# EAGLE board CryptoShield_Panel_v10 (EAGLE 6.6.0), part 1 of 3
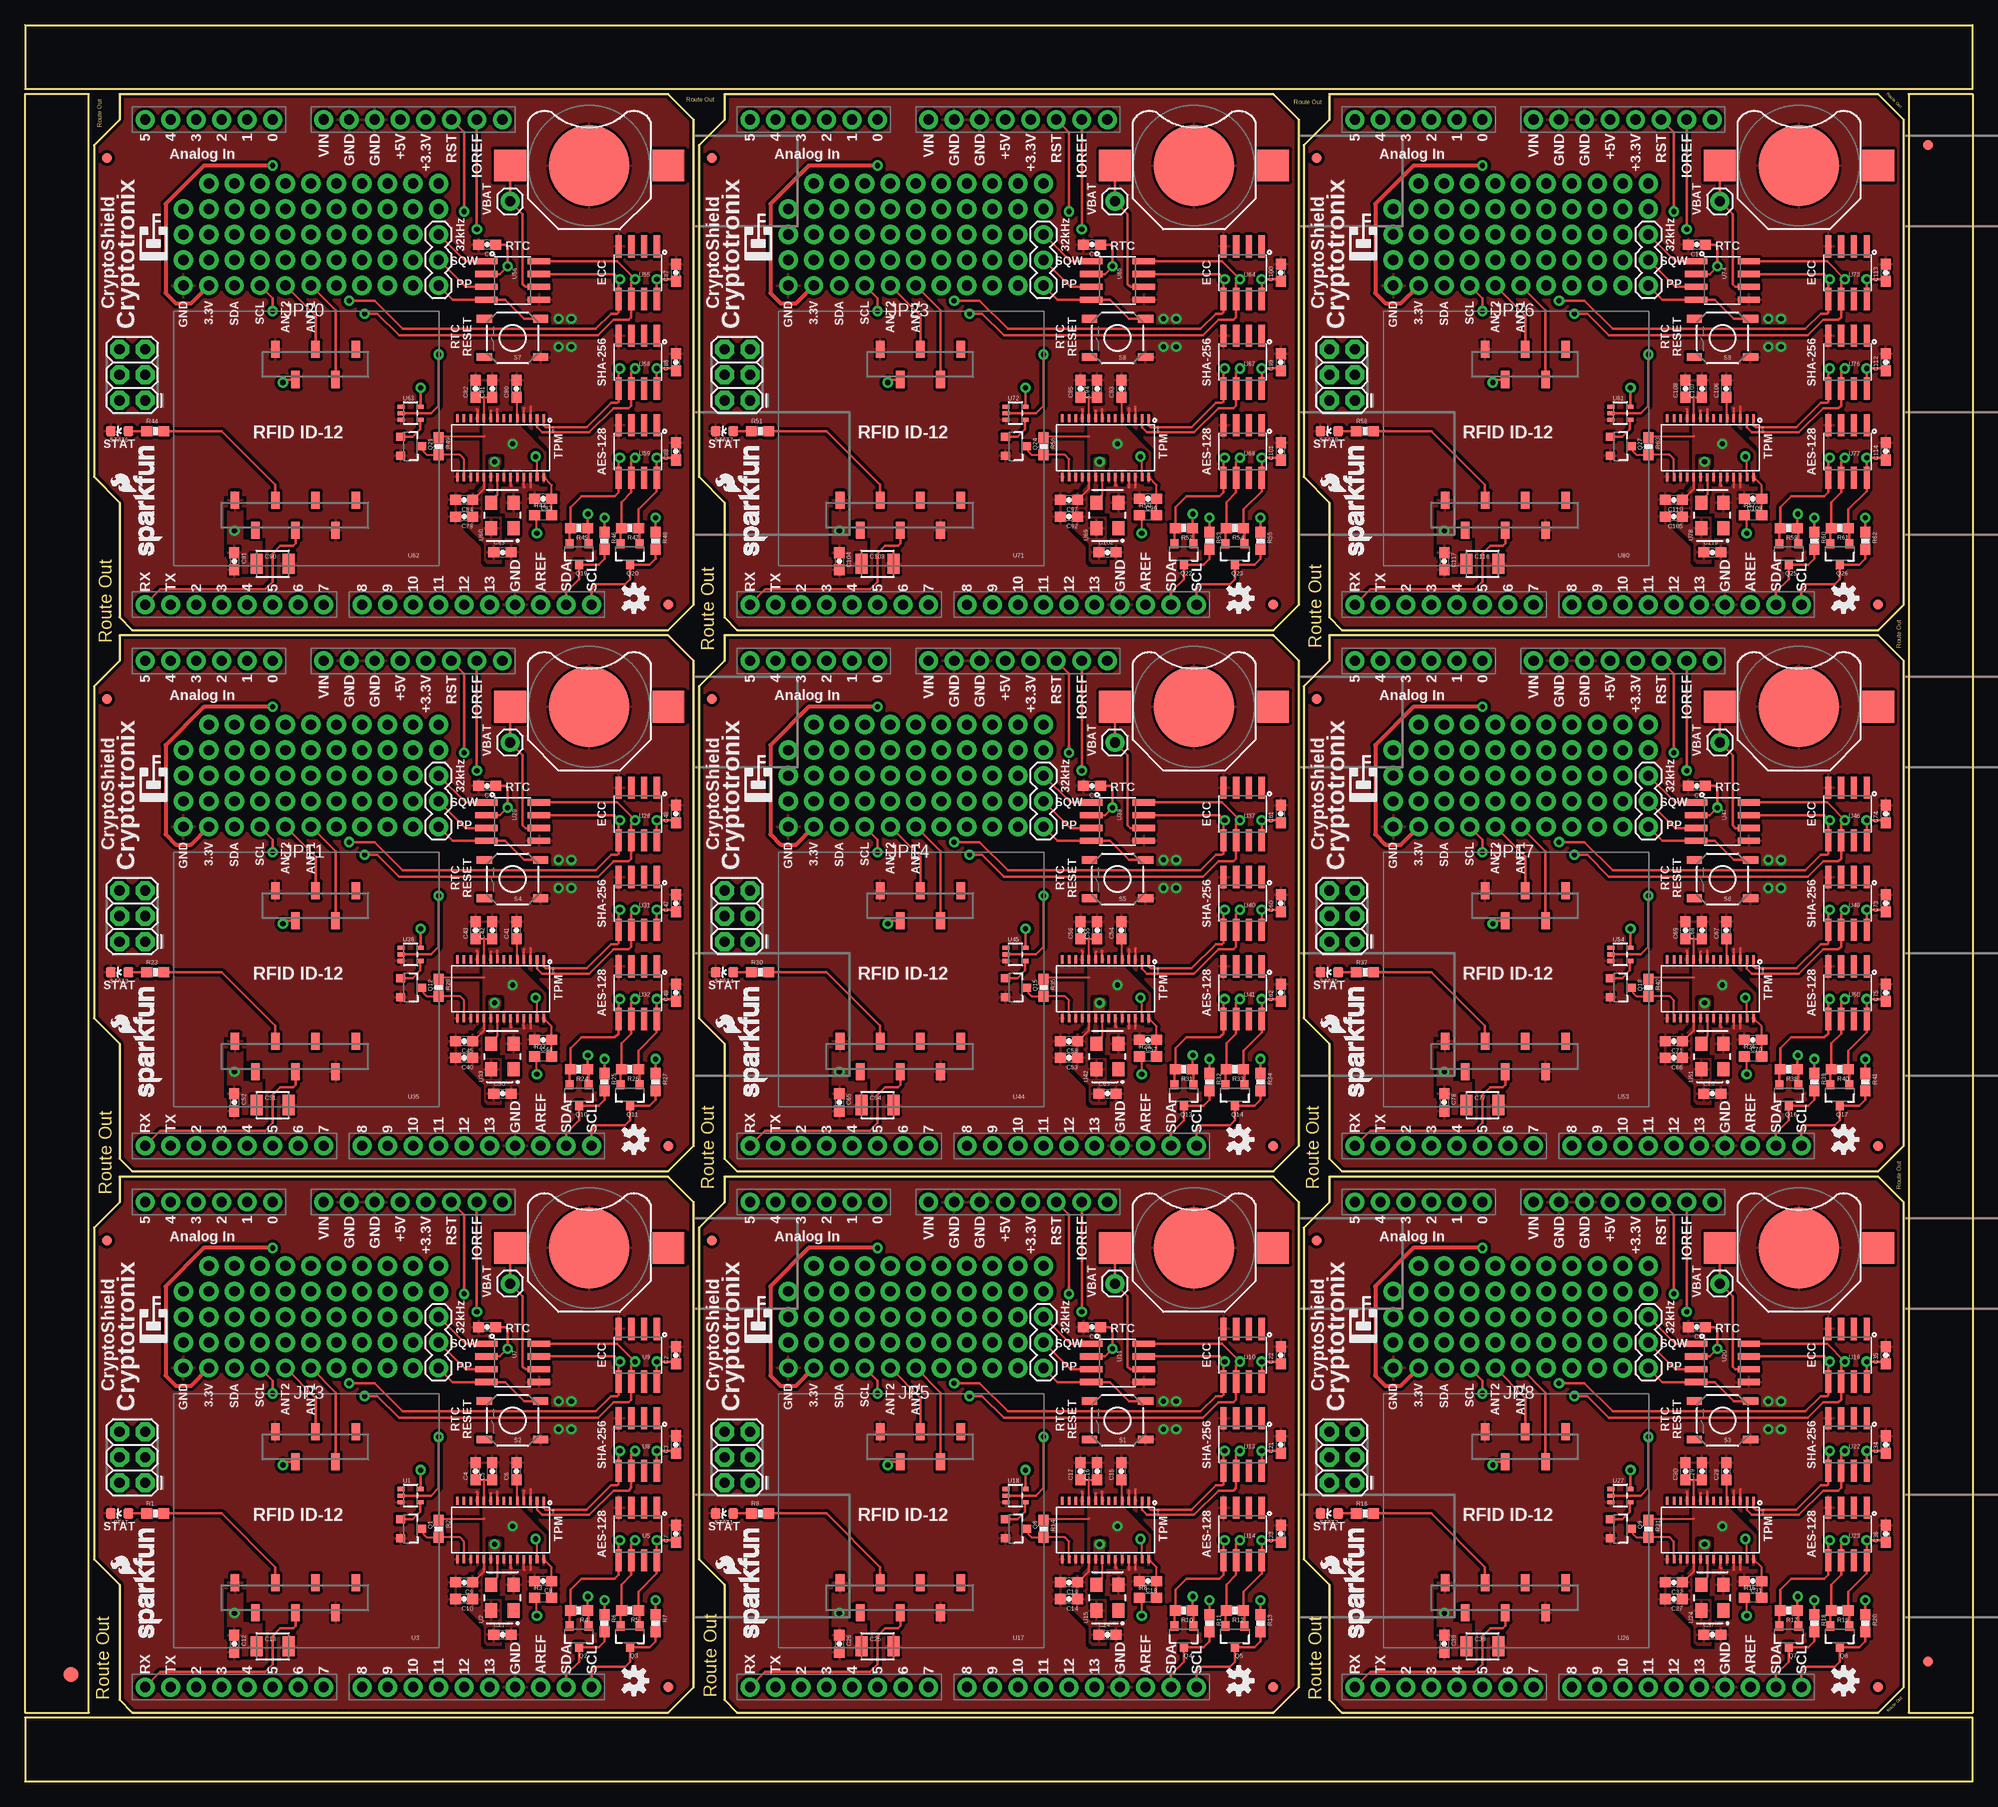
[diagram p0: board, top side]
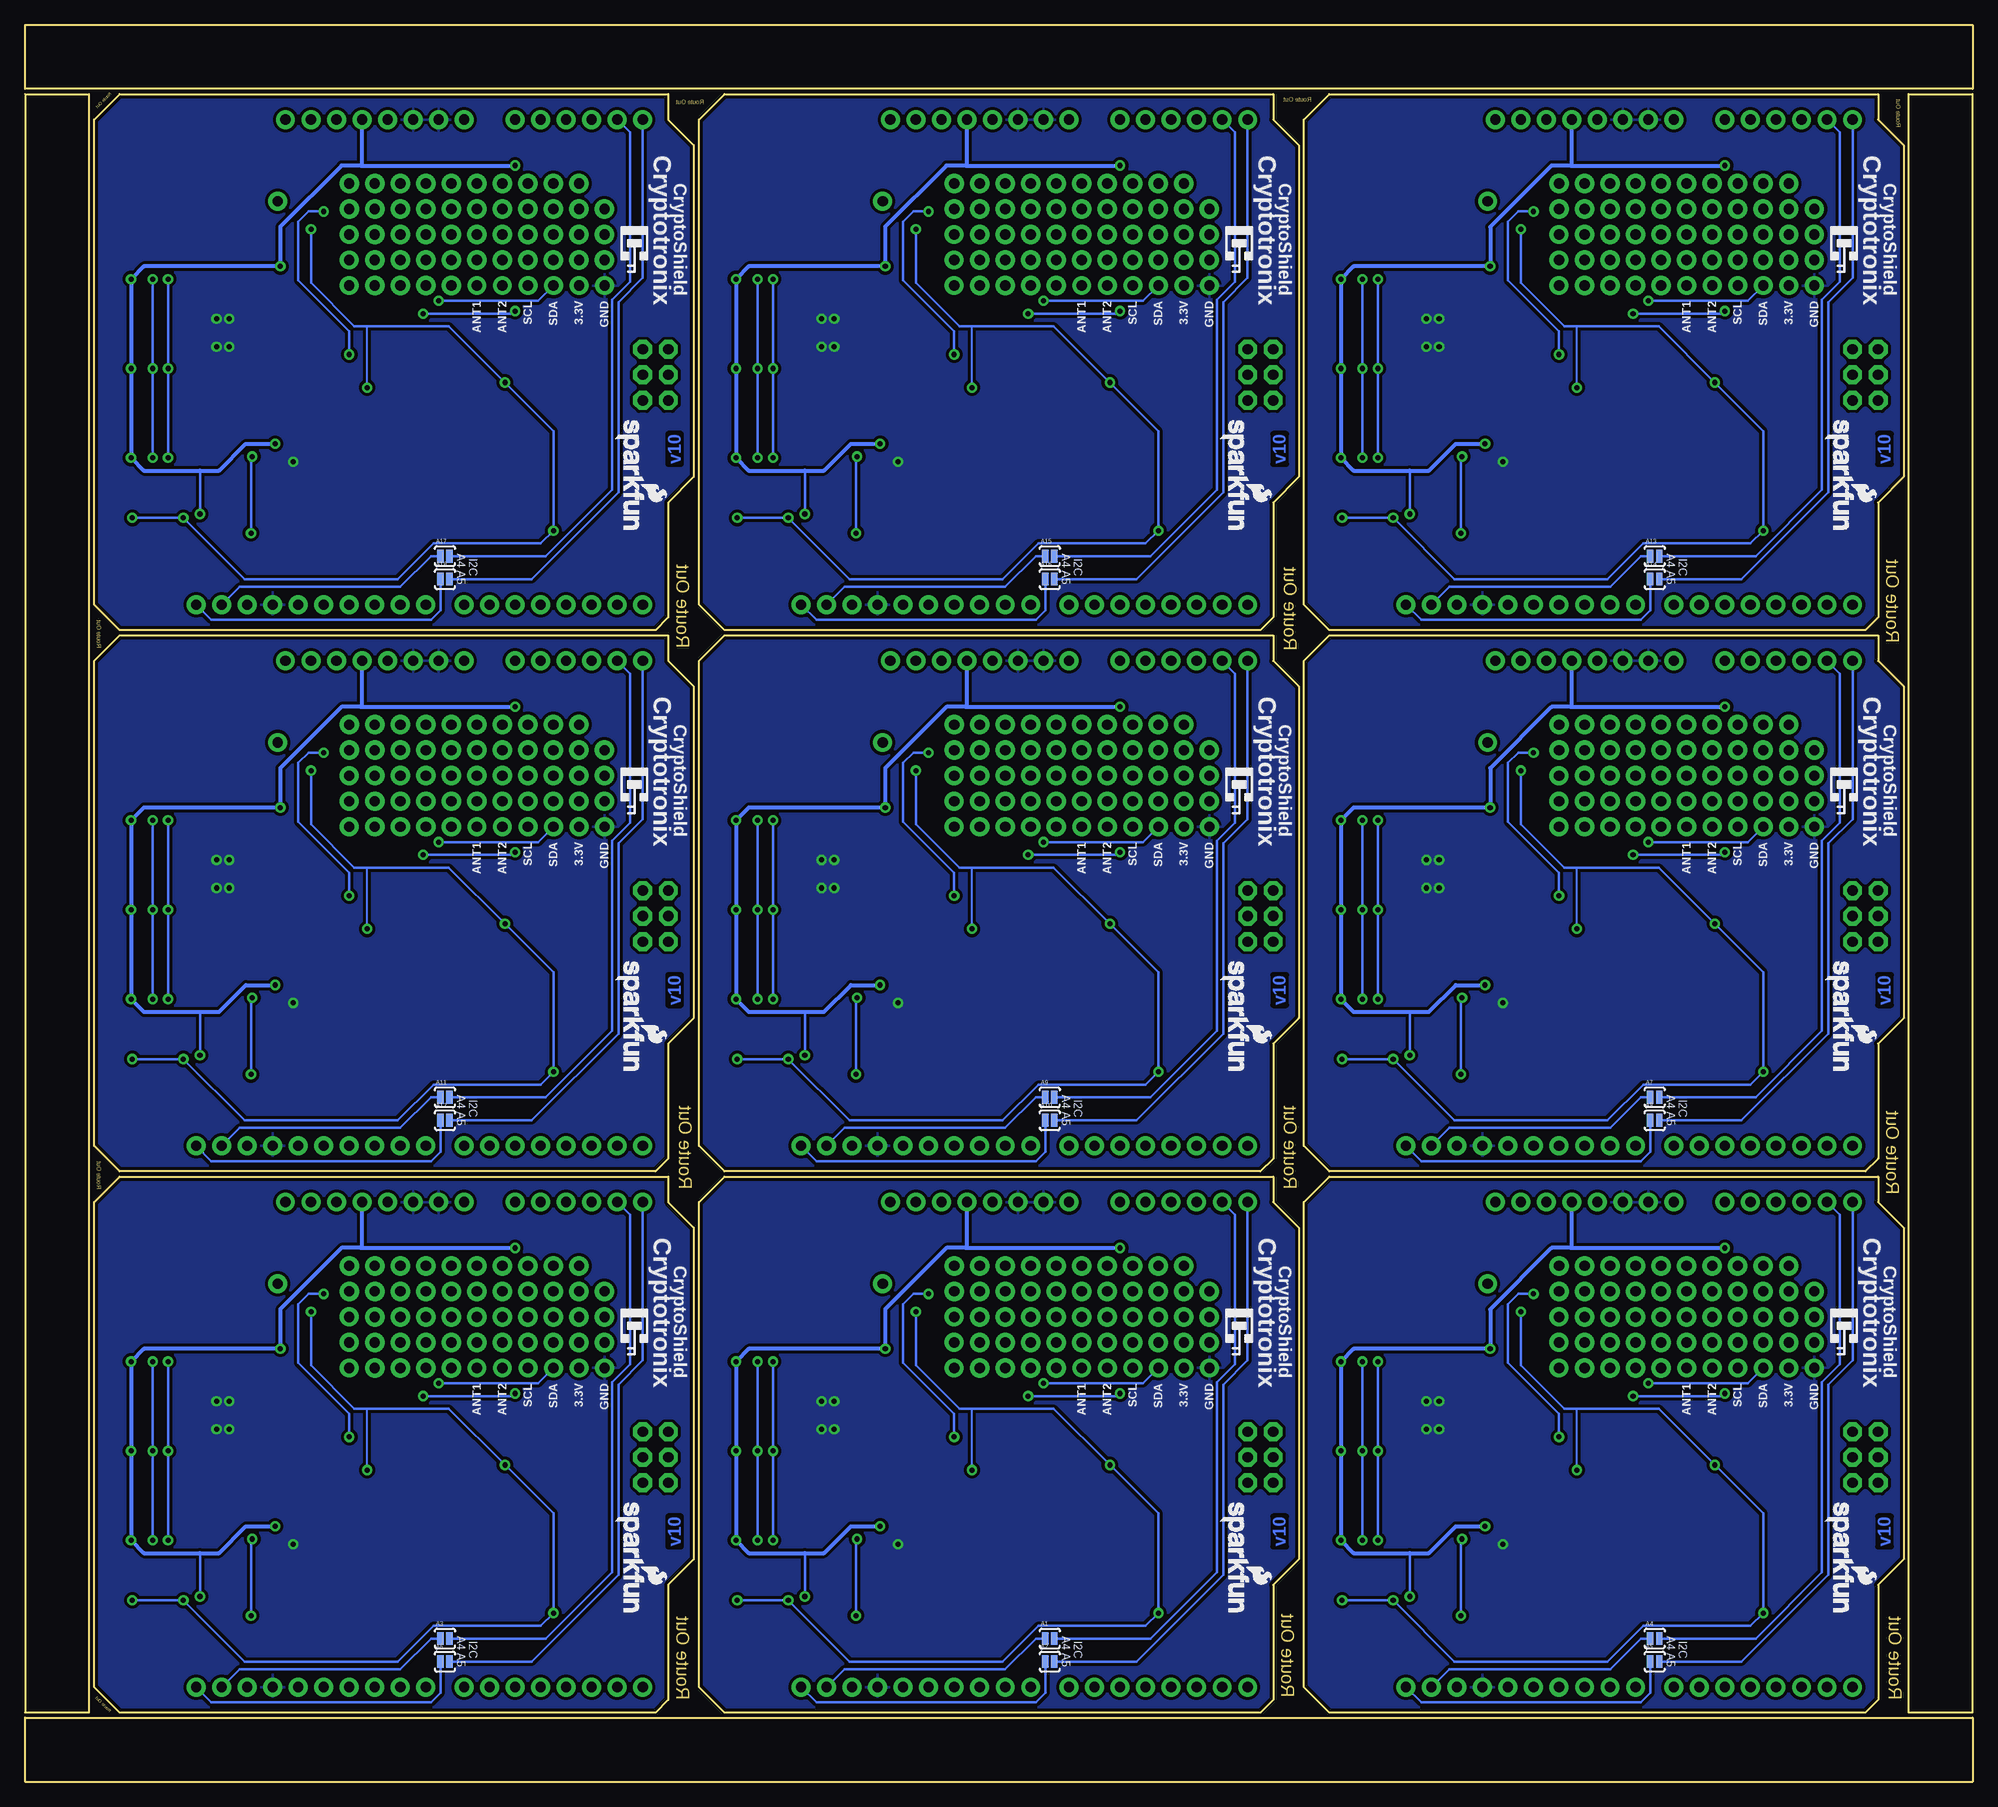
[diagram p1: board, bottom side, seen from below]

Size 193.8 x 174.75 mm. Coordinates in mm from the lower left corner, seen from the top.
Outline: 10.67,6.86 64.01,6.86 66.55,9.4 66.55,57.66 64.01,60.2 9.4,60.2 9.4,57.66 6.86,55.12 6.86,22.1 9.4,19.56 9.4,8.13 10.67,6.86
Outline: 70.87,6.86 124.21,6.86 126.75,9.4 126.75,57.66 124.21,60.2 69.6,60.2 69.6,57.66 67.06,55.12 67.06,22.1 69.6,19.56 69.6,8.13 70.87,6.86
Outline: 131.06,6.86 184.4,6.86 186.94,9.4 186.94,57.66 184.4,60.2 129.79,60.2 129.79,57.66 127.25,55.12 127.25,22.1 129.79,19.56 129.79,8.13 131.06,6.86
Outline: 10.67,60.71 64.01,60.71 66.55,63.25 66.55,111.51 64.01,114.05 9.4,114.05 9.4,111.51 6.86,108.97 6.86,75.95 9.4,73.41 9.4,61.98 10.67,60.71
Outline: 70.87,60.71 124.21,60.71 126.75,63.25 126.75,111.51 124.21,114.05 69.6,114.05 69.6,111.51 67.06,108.97 67.06,75.95 69.6,73.41 69.6,61.98 70.87,60.71
Outline: 131.06,60.71 184.4,60.71 186.94,63.25 186.94,111.51 184.4,114.05 129.79,114.05 129.79,111.51 127.25,108.97 127.25,75.95 129.79,73.41 129.79,61.98 131.06,60.71
Outline: 10.67,114.55 64.01,114.55 66.55,117.09 66.55,165.35 64.01,167.89 9.4,167.89 9.4,165.35 6.86,162.81 6.86,129.79 9.4,127.25 9.4,115.82 10.67,114.55
Outline: 70.87,114.55 124.21,114.55 126.75,117.09 126.75,165.35 124.21,167.89 69.6,167.89 69.6,165.35 67.06,162.81 67.06,129.79 69.6,127.25 69.6,115.82 70.87,114.55
Outline: 131.06,114.55 184.4,114.55 186.94,117.09 186.94,165.35 184.4,167.89 129.79,167.89 129.79,165.35 127.25,162.81 127.25,129.79 129.79,127.25 129.79,115.82 131.06,114.55
Outline: 6.35,6.86 6.35,167.89 0,167.89 0,6.86 6.35,6.86
Outline: 0,6.35 0,0 193.8,0 193.8,6.35 0,6.35
Outline: 0,168.4 193.8,168.4 193.8,174.75 0,174.75 0,168.4
Outline: 187.45,167.89 187.45,6.86 193.8,6.86 193.8,167.89 187.45,167.89
Copper layers (1*16): Top 0.035mm / dielectric 1.5mm / Bottom 0.035mm
Design rules "SparkFun-2-layer": minimum track width 7mil, minimum drill 15mil, track to track 8mil, track to pad 8mil, pad to pad 8mil, via to via 8mil, smd to smd 8mil, copper to edge 8mil, drill to drill 8mil, minimum pad ring 12mil, minimum via ring 10mil, stop-mask expansion 4mil, vias tented up to drill 20mil, thermal gap 10mil
tRestrict: 36 lines

## Footprints (pad centres in the part's own frame; a part is rotated, then mirrored left to right if it is on the bottom)
PAD-JUMPER-2-NO_YES_SILK = smd 0.635 x 1.27: 1 -0.45,0; 2 0.45,0
BATTCON_12MM = smd 8 x 8: GND 0,0 | smd 3.175 x 3.175: PWR@1 -7.874,0; PWR@2 7.874,0
0603-CAP = smd 1.1 x 1: 1 -0.85,0; 2 0.85,0
1210 = smd 1.2 x 2: 1 -1.6,0; 2 1.6,0
FIDUCIAL-1.5X3 = smd 1.5 x 1.5: 1 0,0
FIDUCIAL-1X2 = smd 1 x 1: 1 0,0
2X3 = drill 1.016 pad 1.88 octagon: 1 0,0; 2 0,2.54; 3 2.54,0; 4 2.54,2.54; 5 5.08,0; 6 5.08,2.54
1X01 = drill 1.016 pad 1.88: 1 0,0
1X03 = drill 1.016 pad 1.88: 1 0,0; 2 2.54,0; 3 5.08,0
1X06_NO_SILK = drill 1.016 pad 1.88: 1 0,0; 2 2.54,0; 3 5.08,0; 4 7.62,0; 5 10.16,0; 6 12.7,0
SOT23-3 = smd 0.8 x 0.9: 1 -0.95,-1; 2 0.95,-1; 3 0,1.1
0603-RES = smd 1.1 x 1: 1 -0.85,0; 2 0.85,0
0603 = smd 1.1 x 1: 1 -0.85,0; 2 0.85,0
TACTILE-SWITCH-SMD = smd 1.524 x 0.762: 1 -2.794,1.905; 2 2.794,1.905; 3 -2.794,-1.905; 4 2.794,-1.905
LED-0603 = smd 1 x 1: A 0,-0.877; C 0,0.877
SOT353 = smd 0.42 x 0.7: 1 -0.65,-0.95; 2 0,-0.95; 3 0.65,-0.95; 4 0.65,0.95; 5 -0.65,0.95
CRYSTAL-OSC-SMD-5X3.2 = smd 1.397 x 1.194: 1 -1.27,-1.1; 2 1.27,-1.1; 3 1.27,1.1; 4 -1.27,1.1
ID-12_SMD = smd 0.85 x 1.7: 1 16.248,3.81; 2 14.248,6.81; 3 12.248,3.81; 4 10.248,6.81; 5 8.248,3.81; 6 8.248,18.822; 7 10.248,21.822; 8 12.248,18.822; 9 14.248,21.822; 10 16.248,18.822; 11 20.248,18.822; NC 18.248,21.822
UNO_R3_SHIELD = drill 1.016 pad 1.88: 3.3V 50.8,26.67; 5V 50.8,29.21; A0 50.8,41.91; A1 50.8,44.45; A2 50.8,46.99; A3 50.8,49.53; A4 50.8,52.07; A5 50.8,54.61; AREF 2.54,15.24; D2 2.54,49.53; D3 2.54,46.99; D4 2.54,44.45; D5 2.54,41.91; D6 2.54,39.37; D7 2.54,36.83; D8 2.54,33.02; D9 2.54,30.48; D10 2.54,27.94; D11 2.54,25.4; D12 2.54,22.86; D13 2.54,20.32; GND@0 50.8,31.75; GND@1 50.8,34.29; GND@2 2.54,17.78; IOREF 50.8,21.59; NC 50.8,19.05; RES 50.8,24.13; RX 2.54,54.61; SCL 2.54,10.16; SDA 2.54,12.7; TX 2.54,52.07; VIN 50.8,36.83
SOIC8 = smd 0.61 x 2.21: 1 -1.905,-2.616; 2 -0.635,-2.616; 3 0.635,-2.616; 4 1.905,-2.616; 5 1.905,2.616; 6 0.635,2.616; 7 -0.635,2.616; 8 -1.905,2.616
TSSOP28 = smd 0.8 x 0.25: 1 -2.921,4.623; 2 -2.921,3.962; 3 -2.921,3.302; 4 -2.921,2.642; 5 -2.921,1.981; 6 -2.921,1.321; 7 -2.921,0.66; 8 -2.927,0; 9 -2.921,-0.66; 10 -2.921,-1.321; 11 -2.921,-1.981; 12 -2.921,-2.642; 13 -2.921,-3.302; 14 -2.921,-3.962; 15 2.921,-3.962; 16 2.921,-3.302; 17 2.921,-2.642; 18 2.921,-1.981; 19 2.921,-1.321; 20 2.921,-0.66; 21 2.927,0; 22 2.921,0.66; 23 2.921,1.321; 24 2.921,1.981; 25 2.921,2.642; 26 2.921,3.302; 27 2.921,3.962; 28 2.921,4.623

## Placement (x,y rotation side)
A1  [PAD-JUMPER-2-NO_YES_SILK]  91.82,14.22 0 bottom
A2  [PAD-JUMPER-2-NO_YES_SILK]  91.82,11.94 0 bottom
A3  [PAD-JUMPER-2-NO_YES_SILK]  152.02,14.22 0 bottom
A4  [PAD-JUMPER-2-NO_YES_SILK]  31.62,14.22 0 bottom
A5  [PAD-JUMPER-2-NO_YES_SILK]  31.62,11.94 0 bottom
A6  [PAD-JUMPER-2-NO_YES_SILK]  152.02,11.94 0 bottom
A7  [PAD-JUMPER-2-NO_YES_SILK]  31.62,68.07 0 bottom
A8  [PAD-JUMPER-2-NO_YES_SILK]  31.62,65.79 0 bottom
A9  [PAD-JUMPER-2-NO_YES_SILK]  91.82,68.07 0 bottom
A10  [PAD-JUMPER-2-NO_YES_SILK]  91.82,65.79 0 bottom
A11  [PAD-JUMPER-2-NO_YES_SILK]  152.02,68.07 0 bottom
A12  [PAD-JUMPER-2-NO_YES_SILK]  152.02,65.79 0 bottom
A13  [PAD-JUMPER-2-NO_YES_SILK]  31.62,121.92 0 bottom
A14  [PAD-JUMPER-2-NO_YES_SILK]  31.62,119.63 0 bottom
A15  [PAD-JUMPER-2-NO_YES_SILK]  91.82,121.92 0 bottom
A16  [PAD-JUMPER-2-NO_YES_SILK]  91.82,119.63 0 bottom
A17  [PAD-JUMPER-2-NO_YES_SILK]  152.02,121.92 0 bottom
A18  [PAD-JUMPER-2-NO_YES_SILK]  152.02,119.63 0 bottom
BAT1  3V  [BATTCON_12MM]  56.13,53.09 0 top
BAT2  3V  [BATTCON_12MM]  116.33,53.09 0 top
BAT3  3V  [BATTCON_12MM]  176.53,53.09 0 top
BAT4  3V  [BATTCON_12MM]  56.13,106.93 0 top
BAT5  3V  [BATTCON_12MM]  116.33,106.93 0 top
BAT6  3V  [BATTCON_12MM]  176.53,106.93 0 top
BAT7  3V  [BATTCON_12MM]  56.13,160.78 0 top
BAT8  3V  [BATTCON_12MM]  116.33,160.78 0 top
BAT9  3V  [BATTCON_12MM]  176.53,160.78 0 top
C1  0.1uF  [0603-CAP]  45.97,45.21 180 top
C2  0.1uF  [0603-CAP]  64.77,42.42 90 top
C3  0.1uF  [0603-CAP]  64.77,33.53 90 top
C4  .1uf  [0603-CAP]  44.83,30.86 90 top
C5  2200pf  [0603-CAP]  46.48,30.86 90 top
C6  2200pf  [0603-CAP]  48.9,30.86 90 top
C7  0.1uF  [0603-CAP]  64.77,24.64 90 top
C8  2200pf  [0603-CAP]  51.56,19.94 180 top
C9  2200pf  [0603-CAP]  43.69,19.81 180 top
C10  .1uf  [0603-CAP]  43.69,18.16 180 top
C11  .1uf  [0603-CAP]  47.5,14.61 0 top
C12  0.1uF  [0603-CAP]  20.83,13.72 270 top
C13  10uF  [1210]  24.64,13.46 0 top
C14  .1uf  [0603-CAP]  103.89,18.16 180 top
C15  2200pf  [0603-CAP]  109.09,30.86 90 top
C16  2200pf  [0603-CAP]  106.68,30.86 90 top
C17  .1uf  [0603-CAP]  105.03,30.86 90 top
C18  2200pf  [0603-CAP]  111.76,19.94 180 top
C19  2200pf  [0603-CAP]  103.89,19.81 180 top
C20  0.1uF  [0603-CAP]  106.17,45.21 180 top
C21  0.1uF  [0603-CAP]  124.97,33.53 90 top
C22  0.1uF  [0603-CAP]  124.97,42.42 90 top
C23  0.1uF  [0603-CAP]  124.97,24.64 90 top
C24  .1uf  [0603-CAP]  107.7,14.61 0 top
C25  10uF  [1210]  84.84,13.46 0 top
C26  0.1uF  [0603-CAP]  81.03,13.72 270 top
C27  .1uf  [0603-CAP]  164.08,18.16 180 top
C28  2200pf  [0603-CAP]  169.29,30.86 90 top
C29  2200pf  [0603-CAP]  166.88,30.86 90 top
C30  .1uf  [0603-CAP]  165.23,30.86 90 top
C31  2200pf  [0603-CAP]  171.96,19.94 180 top
C32  2200pf  [0603-CAP]  164.08,19.81 180 top
C33  0.1uF  [0603-CAP]  166.37,45.21 180 top
C34  0.1uF  [0603-CAP]  185.17,33.53 90 top
C35  0.1uF  [0603-CAP]  185.17,42.42 90 top
C36  0.1uF  [0603-CAP]  185.17,24.64 90 top
C37  .1uf  [0603-CAP]  167.89,14.61 0 top
C38  10uF  [1210]  145.03,13.46 0 top
C39  0.1uF  [0603-CAP]  141.22,13.72 270 top
C40  .1uf  [0603-CAP]  43.69,72.01 180 top
C41  2200pf  [0603-CAP]  48.9,84.71 90 top
C42  2200pf  [0603-CAP]  46.48,84.71 90 top
C43  .1uf  [0603-CAP]  44.83,84.71 90 top
C44  2200pf  [0603-CAP]  51.56,73.79 180 top
C45  2200pf  [0603-CAP]  43.69,73.66 180 top
C46  0.1uF  [0603-CAP]  45.97,99.06 180 top
C47  0.1uF  [0603-CAP]  64.77,87.38 90 top
C48  0.1uF  [0603-CAP]  64.77,96.27 90 top
C49  0.1uF  [0603-CAP]  64.77,78.49 90 top
C50  .1uf  [0603-CAP]  47.5,68.45 0 top
C51  10uF  [1210]  24.64,67.31 0 top
C52  0.1uF  [0603-CAP]  20.83,67.56 270 top
C53  .1uf  [0603-CAP]  103.89,72.01 180 top
C54  2200pf  [0603-CAP]  109.09,84.71 90 top
C55  2200pf  [0603-CAP]  106.68,84.71 90 top
C56  .1uf  [0603-CAP]  105.03,84.71 90 top
C57  2200pf  [0603-CAP]  111.76,73.79 180 top
C58  2200pf  [0603-CAP]  103.89,73.66 180 top
C59  0.1uF  [0603-CAP]  106.17,99.06 180 top
C60  0.1uF  [0603-CAP]  124.97,87.38 90 top
C61  0.1uF  [0603-CAP]  124.97,96.27 90 top
C62  0.1uF  [0603-CAP]  124.97,78.49 90 top
C63  .1uf  [0603-CAP]  107.7,68.45 0 top
C64  10uF  [1210]  84.84,67.31 0 top
C65  0.1uF  [0603-CAP]  81.03,67.56 270 top
C66  .1uf  [0603-CAP]  164.08,72.01 180 top
C67  2200pf  [0603-CAP]  169.29,84.71 90 top
C68  2200pf  [0603-CAP]  166.88,84.71 90 top
C69  .1uf  [0603-CAP]  165.23,84.71 90 top
C70  2200pf  [0603-CAP]  171.96,73.79 180 top
C71  2200pf  [0603-CAP]  164.08,73.66 180 top
C72  0.1uF  [0603-CAP]  166.37,99.06 180 top
C73  0.1uF  [0603-CAP]  185.17,87.38 90 top
C74  0.1uF  [0603-CAP]  185.17,96.27 90 top
C75  0.1uF  [0603-CAP]  185.17,78.49 90 top
C76  .1uf  [0603-CAP]  167.89,68.45 0 top
C77  10uF  [1210]  145.03,67.31 0 top
C78  0.1uF  [0603-CAP]  141.22,67.56 270 top
C79  .1uf  [0603-CAP]  43.69,125.86 180 top
C80  2200pf  [0603-CAP]  48.9,138.56 90 top
C81  2200pf  [0603-CAP]  46.48,138.56 90 top
C82  .1uf  [0603-CAP]  44.83,138.56 90 top
C83  2200pf  [0603-CAP]  51.56,127.64 180 top
C84  2200pf  [0603-CAP]  43.69,127.51 180 top
C85  0.1uF  [0603-CAP]  45.97,152.91 180 top
C86  0.1uF  [0603-CAP]  64.77,141.22 90 top
C87  0.1uF  [0603-CAP]  64.77,150.11 90 top
C88  0.1uF  [0603-CAP]  64.77,132.33 90 top
C89  .1uf  [0603-CAP]  47.5,122.3 0 top
C90  10uF  [1210]  24.64,121.16 0 top
C91  0.1uF  [0603-CAP]  20.83,121.41 270 top
C92  .1uf  [0603-CAP]  103.89,125.86 180 top
C93  2200pf  [0603-CAP]  109.09,138.56 90 top
C94  2200pf  [0603-CAP]  106.68,138.56 90 top
C95  .1uf  [0603-CAP]  105.03,138.56 90 top
C96  2200pf  [0603-CAP]  111.76,127.64 180 top
C97  2200pf  [0603-CAP]  103.89,127.51 180 top
C98  0.1uF  [0603-CAP]  106.17,152.91 180 top
C99  0.1uF  [0603-CAP]  124.97,141.22 90 top
C100  0.1uF  [0603-CAP]  124.97,150.11 90 top
C101  0.1uF  [0603-CAP]  124.97,132.33 90 top
C102  .1uf  [0603-CAP]  107.7,122.3 0 top
C103  10uF  [1210]  84.84,121.16 0 top
C104  0.1uF  [0603-CAP]  81.03,121.41 270 top
C105  .1uf  [0603-CAP]  164.08,125.86 180 top
C106  2200pf  [0603-CAP]  169.29,138.56 90 top
C107  2200pf  [0603-CAP]  166.88,138.56 90 top
C108  .1uf  [0603-CAP]  165.23,138.56 90 top
C109  2200pf  [0603-CAP]  171.96,127.64 180 top
C110  2200pf  [0603-CAP]  164.08,127.51 180 top
C111  0.1uF  [0603-CAP]  166.37,152.91 180 top
C112  0.1uF  [0603-CAP]  185.17,141.22 90 top
C113  0.1uF  [0603-CAP]  185.17,150.11 90 top
C114  0.1uF  [0603-CAP]  185.17,132.33 90 top
C115  .1uf  [0603-CAP]  167.89,122.3 0 top
C116  10uF  [1210]  145.03,121.16 0 top
C117  0.1uF  [0603-CAP]  141.22,121.41 270 top
E$1  [FIDUCIAL-1.5X3]  4.57,10.67 0 top
E$6  [FIDUCIAL-1X2]  189.36,162.81 180 top
E$8  [FIDUCIAL-1X2]  189.36,11.94 0 top
FID1  FIDUCIAL1X2  [FIDUCIAL-1X2]  8.13,53.85 0 top
FID2  FIDUCIAL1X2  [FIDUCIAL-1X2]  64.01,9.4 0 top
FID3  FIDUCIAL1X2  [FIDUCIAL-1X2]  68.33,53.85 0 top
FID4  FIDUCIAL1X2  [FIDUCIAL-1X2]  124.21,9.4 0 top
FID5  FIDUCIAL1X2  [FIDUCIAL-1X2]  128.52,53.85 0 top
FID6  FIDUCIAL1X2  [FIDUCIAL-1X2]  184.4,9.4 0 top
FID7  FIDUCIAL1X2  [FIDUCIAL-1X2]  8.13,107.7 0 top
FID8  FIDUCIAL1X2  [FIDUCIAL-1X2]  64.01,63.25 0 top
FID9  FIDUCIAL1X2  [FIDUCIAL-1X2]  68.33,107.7 0 top
FID10  FIDUCIAL1X2  [FIDUCIAL-1X2]  124.21,63.25 0 top
FID11  FIDUCIAL1X2  [FIDUCIAL-1X2]  128.52,107.7 0 top
FID12  FIDUCIAL1X2  [FIDUCIAL-1X2]  184.4,63.25 0 top
FID13  FIDUCIAL1X2  [FIDUCIAL-1X2]  8.13,161.54 0 top
FID14  FIDUCIAL1X2  [FIDUCIAL-1X2]  64.01,117.09 0 top
FID15  FIDUCIAL1X2  [FIDUCIAL-1X2]  68.33,161.54 0 top
FID16  FIDUCIAL1X2  [FIDUCIAL-1X2]  124.21,117.09 0 top
FID17  FIDUCIAL1X2  [FIDUCIAL-1X2]  128.52,161.54 0 top
FID18  FIDUCIAL1X2  [FIDUCIAL-1X2]  184.4,117.09 0 top
J1  AVR_SPI_PRG_6PTH  [2X3]  11.94,29.72 90 top
J2  AVR_SPI_PRG_6PTH  [2X3]  72.14,29.72 90 top
J3  AVR_SPI_PRG_6PTH  [2X3]  132.33,29.72 90 top
J4  AVR_SPI_PRG_6PTH  [2X3]  11.94,83.57 90 top
J5  AVR_SPI_PRG_6PTH  [2X3]  72.14,83.57 90 top
J6  AVR_SPI_PRG_6PTH  [2X3]  132.33,83.57 90 top
J7  AVR_SPI_PRG_6PTH  [2X3]  11.94,137.41 90 top
J8  AVR_SPI_PRG_6PTH  [2X3]  72.14,137.41 90 top
J9  AVR_SPI_PRG_6PTH  [2X3]  132.33,137.41 90 top
JP1  M01PTH  [1X01]  48.26,49.53 0 top
JP2  [1X03]  41.15,46.23 270 top
JP3  [1X06_NO_SILK]  28.45,41.15 180 top
JP4  M01PTH  [1X01]  108.46,49.53 0 top
JP5  [1X06_NO_SILK]  88.65,41.15 180 top
JP6  [1X03]  101.35,46.23 270 top
JP7  M01PTH  [1X01]  168.66,49.53 0 top
JP8  [1X06_NO_SILK]  148.84,41.15 180 top
JP9  [1X03]  161.54,46.23 270 top
JP10  M01PTH  [1X01]  48.26,103.38 0 top
JP11  [1X06_NO_SILK]  28.45,95 180 top
JP12  [1X03]  41.15,100.08 270 top
JP13  M01PTH  [1X01]  108.46,103.38 0 top
JP14  [1X06_NO_SILK]  88.65,95 180 top
JP15  [1X03]  101.35,100.08 270 top
JP16  M01PTH  [1X01]  168.66,103.38 0 top
JP17  [1X06_NO_SILK]  148.84,95 180 top
JP18  [1X03]  161.54,100.08 270 top
JP19  M01PTH  [1X01]  48.26,157.23 0 top
JP20  [1X06_NO_SILK]  28.45,148.84 180 top
JP21  [1X03]  41.15,153.92 270 top
JP22  M01PTH  [1X01]  108.46,157.23 0 top
JP23  [1X06_NO_SILK]  88.65,148.84 180 top
JP24  [1X03]  101.35,153.92 270 top
JP25  M01PTH  [1X01]  168.66,157.23 0 top
JP26  [1X06_NO_SILK]  148.84,148.84 180 top
JP27  [1X03]  161.54,153.92 270 top
LOGO1  OSHW-LOGOS  [OSHW-LOGO-S]  120.78,10.03 270 top
LOGO2  OSHW-LOGOS  [OSHW-LOGO-S]  60.58,10.03 270 top
LOGO3  SFE_LOGO_NAME_FLAME.1_INCH  [SFE_LOGO_NAME_FLAME_.1]  13.72,13.84 90 top
LOGO4  SFE_LOGO_NAME_FLAME.1_INCH  [SFE_LOGO_NAME_FLAME_.1]  73.91,13.84 90 top
LOGO5  OSHW-LOGOS  [OSHW-LOGO-S]  180.97,10.03 270 top
LOGO6  SFE_LOGO_NAME_FLAME.1_INCH  [SFE_LOGO_NAME_FLAME_.1]  134.11,13.84 90 top
LOGO7  OSHW-LOGOS  [OSHW-LOGO-S]  60.58,63.88 270 top
LOGO8  SFE_LOGO_NAME_FLAME.1_INCH  [SFE_LOGO_NAME_FLAME_.1]  13.72,67.69 90 top
LOGO9  OSHW-LOGOS  [OSHW-LOGO-S]  120.78,63.88 270 top
LOGO10  SFE_LOGO_NAME_FLAME.1_INCH  [SFE_LOGO_NAME_FLAME_.1]  73.91,67.69 90 top
LOGO11  OSHW-LOGOS  [OSHW-LOGO-S]  180.97,63.88 270 top
LOGO12  SFE_LOGO_NAME_FLAME.1_INCH  [SFE_LOGO_NAME_FLAME_.1]  134.11,67.69 90 top
LOGO13  OSHW-LOGOS  [OSHW-LOGO-S]  60.58,117.73 270 top
LOGO14  SFE_LOGO_NAME_FLAME.1_INCH  [SFE_LOGO_NAME_FLAME_.1]  13.72,121.54 90 top
LOGO15  OSHW-LOGOS  [OSHW-LOGO-S]  120.78,117.73 270 top
LOGO16  SFE_LOGO_NAME_FLAME.1_INCH  [SFE_LOGO_NAME_FLAME_.1]  73.91,121.54 90 top
LOGO17  OSHW-LOGOS  [OSHW-LOGO-S]  180.97,117.73 270 top
LOGO18  SFE_LOGO_NAME_FLAME.1_INCH  [SFE_LOGO_NAME_FLAME_.1]  134.11,121.54 90 top
Q1  BSS138  [SOT23-3]  38.35,25.15 270 top
Q2  BSS138  [SOT23-3]  55.12,14.48 180 top
Q3  BSS138  [SOT23-3]  60.2,14.48 180 top
Q4  BSS138  [SOT23-3]  115.32,14.48 180 top
Q5  BSS138  [SOT23-3]  120.4,14.48 180 top
Q6  BSS138  [SOT23-3]  98.55,25.15 270 top
Q7  BSS138  [SOT23-3]  175.51,14.48 180 top
Q8  BSS138  [SOT23-3]  180.59,14.48 180 top
Q9  BSS138  [SOT23-3]  158.75,25.15 270 top
Q10  BSS138  [SOT23-3]  55.12,68.33 180 top
Q11  BSS138  [SOT23-3]  60.2,68.33 180 top
Q12  BSS138  [SOT23-3]  38.35,78.99 270 top
Q13  BSS138  [SOT23-3]  115.32,68.33 180 top
Q14  BSS138  [SOT23-3]  120.4,68.33 180 top
Q15  BSS138  [SOT23-3]  98.55,78.99 270 top
Q16  BSS138  [SOT23-3]  175.51,68.33 180 top
Q17  BSS138  [SOT23-3]  180.59,68.33 180 top
Q18  BSS138  [SOT23-3]  158.75,78.99 270 top
Q19  BSS138  [SOT23-3]  55.12,122.17 180 top
Q20  BSS138  [SOT23-3]  60.2,122.17 180 top
Q21  BSS138  [SOT23-3]  38.35,132.84 270 top
Q22  BSS138  [SOT23-3]  115.32,122.17 180 top
Q23  BSS138  [SOT23-3]  120.4,122.17 180 top
Q24  BSS138  [SOT23-3]  98.55,132.84 270 top
Q25  BSS138  [SOT23-3]  175.51,122.17 180 top
Q26  BSS138  [SOT23-3]  180.59,122.17 180 top
Q27  BSS138  [SOT23-3]  158.75,132.84 270 top
R1  1k  [0603-RES]  12.95,26.67 0 top
R2  10K  [0603-RES]  41.15,25.15 270 top
R3  4.7K  [0603]  51.56,18.29 0 top
R4  10K  [0603-RES]  55.12,17.02 180 top
R5  10K  [0603-RES]  60.2,17.02 180 top
R6  10K  [0603-RES]  57.66,15.75 270 top
R7  10K  [0603-RES]  62.74,15.75 270 top
R8  4.7K  [0603]  111.76,18.29 0 top
R9  1k  [0603-RES]  73.15,26.67 0 top
R10  10K  [0603-RES]  115.32,17.02 180 top
R11  10K  [0603-RES]  117.86,15.75 270 top
R12  10K  [0603-RES]  120.4,17.02 180 top
R13  10K  [0603-RES]  122.94,15.75 270 top
R14  10K  [0603-RES]  101.35,25.15 270 top
R15  4.7K  [0603]  171.96,18.29 0 top
R16  1k  [0603-RES]  133.35,26.67 0 top
R17  10K  [0603-RES]  175.51,17.02 180 top
R18  10K  [0603-RES]  178.05,15.75 270 top
R19  10K  [0603-RES]  180.59,17.02 180 top
R20  10K  [0603-RES]  183.13,15.75 270 top
R21  10K  [0603-RES]  161.54,25.15 270 top
R22  4.7K  [0603]  51.56,72.14 0 top
R23  1k  [0603-RES]  12.95,80.52 0 top
R24  10K  [0603-RES]  55.12,70.87 180 top
R25  10K  [0603-RES]  57.66,69.6 270 top
R26  10K  [0603-RES]  60.2,70.87 180 top
R27  10K  [0603-RES]  62.74,69.6 270 top
R28  10K  [0603-RES]  41.15,78.99 270 top
R29  4.7K  [0603]  111.76,72.14 0 top
R30  1k  [0603-RES]  73.15,80.52 0 top
R31  10K  [0603-RES]  115.32,70.87 180 top
R32  10K  [0603-RES]  117.86,69.6 270 top
R33  10K  [0603-RES]  120.4,70.87 180 top
R34  10K  [0603-RES]  122.94,69.6 270 top
R35  10K  [0603-RES]  101.35,78.99 270 top
R36  4.7K  [0603]  171.96,72.14 0 top
R37  1k  [0603-RES]  133.35,80.52 0 top
R38  10K  [0603-RES]  175.51,70.87 180 top
R39  10K  [0603-RES]  178.05,69.6 270 top
R40  10K  [0603-RES]  180.59,70.87 180 top
R41  10K  [0603-RES]  183.13,69.6 270 top
R42  10K  [0603-RES]  161.54,78.99 270 top
R43  4.7K  [0603]  51.56,125.98 0 top
R44  1k  [0603-RES]  12.95,134.37 0 top
R45  10K  [0603-RES]  55.12,124.71 180 top
R46  10K  [0603-RES]  57.66,123.44 270 top
R47  10K  [0603-RES]  60.2,124.71 180 top
R48  10K  [0603-RES]  62.74,123.44 270 top
R49  10K  [0603-RES]  41.15,132.84 270 top
R50  4.7K  [0603]  111.76,125.98 0 top
R51  1k  [0603-RES]  73.15,134.37 0 top
R52  10K  [0603-RES]  115.32,124.71 180 top
R53  10K  [0603-RES]  117.86,123.44 270 top
R54  10K  [0603-RES]  120.4,124.71 180 top
R55  10K  [0603-RES]  122.94,123.44 270 top
R56  10K  [0603-RES]  101.35,132.84 270 top
R57  4.7K  [0603]  171.96,125.98 0 top
R58  1k  [0603-RES]  133.35,134.37 0 top
R59  10K  [0603-RES]  175.51,124.71 180 top
R60  10K  [0603-RES]  178.05,123.44 270 top
R61  10K  [0603-RES]  180.59,124.71 180 top
R62  10K  [0603-RES]  183.13,123.44 270 top
R63  10K  [0603-RES]  161.54,132.84 270 top
S1  Reset  [TACTILE-SWITCH-SMD]  108.71,35.94 180 top
S2  Reset  [TACTILE-SWITCH-SMD]  48.51,35.94 180 top
S3  Reset  [TACTILE-SWITCH-SMD]  168.91,35.94 180 top
S4  Reset  [TACTILE-SWITCH-SMD]  48.51,89.79 180 top
S5  Reset  [TACTILE-SWITCH-SMD]  108.71,89.79 180 top
S6  Reset  [TACTILE-SWITCH-SMD]  168.91,89.79 180 top
S7  Reset  [TACTILE-SWITCH-SMD]  48.51,143.64 180 top
S8  Reset  [TACTILE-SWITCH-SMD]  108.71,143.64 180 top
S9  Reset  [TACTILE-SWITCH-SMD]  168.91,143.64 180 top
STAT  GREEN  [LED-0603]  9.4,26.67 90 top
STAT1  GREEN  [LED-0603]  69.6,26.67 90 top
STAT2  GREEN  [LED-0603]  129.79,26.67 90 top
STAT3  GREEN  [LED-0603]  9.4,80.52 90 top
STAT4  GREEN  [LED-0603]  69.6,80.52 90 top
STAT5  GREEN  [LED-0603]  129.79,80.52 90 top
STAT6  GREEN  [LED-0603]  9.4,134.37 90 top
STAT7  GREEN  [LED-0603]  69.6,134.37 90 top
STAT8  GREEN  [LED-0603]  129.79,134.37 90 top
U1  74LVC1G04  [SOT353]  38.35,28.45 270 top
U2  33mhz  [CRYSTAL-OSC-SMD-5X3.2]  47.5,18.29 90 top
U3  ID-12/20SMD  [ID-12_SMD]  41.15,38.61 180 top
U4  ARDUINO_R3_SHIELD  [UNO_R3_SHIELD]  66.55,6.86 90 top
U5  ATAES132  [SOIC8]  60.96,24.64 180 top
U6  AT97SC3204T  [TSSOP28]  46.99,25.02 270 top
U7  DS3231M  [SOIC8]  48.51,41.66 270 top
U8  ATSHA204_SOIC8  [SOIC8]  60.96,33.53 180 top
U9  ATECC108  [SOIC8]  60.96,42.42 180 top
U10  ATECC108  [SOIC8]  121.16,42.42 180 top
U11  DS3231M  [SOIC8]  108.71,41.66 270 top
U12  AT97SC3204T  [TSSOP28]  107.19,25.02 270 top
U13  ATSHA204_SOIC8  [SOIC8]  121.16,33.53 180 top
U14  ATAES132  [SOIC8]  121.16,24.64 180 top
U15  33mhz  [CRYSTAL-OSC-SMD-5X3.2]  107.7,18.29 90 top
U16  ARDUINO_R3_SHIELD  [UNO_R3_SHIELD]  126.75,6.86 90 top
U17  ID-12/20SMD  [ID-12_SMD]  101.35,38.61 180 top
U18  74LVC1G04  [SOT353]  98.55,28.45 270 top
U19  ATECC108  [SOIC8]  181.36,42.42 180 top
U20  DS3231M  [SOIC8]  168.91,41.66 270 top
U21  AT97SC3204T  [TSSOP28]  167.39,25.02 270 top
U22  ATSHA204_SOIC8  [SOIC8]  181.36,33.53 180 top
U23  ATAES132  [SOIC8]  181.36,24.64 180 top
U24  33mhz  [CRYSTAL-OSC-SMD-5X3.2]  167.89,18.29 90 top
U25  ARDUINO_R3_SHIELD  [UNO_R3_SHIELD]  186.94,6.86 90 top
U26  ID-12/20SMD  [ID-12_SMD]  161.54,38.61 180 top
U27  74LVC1G04  [SOT353]  158.75,28.45 270 top
U28  ATECC108  [SOIC8]  60.96,96.27 180 top
U29  DS3231M  [SOIC8]  48.51,95.5 270 top
U30  AT97SC3204T  [TSSOP28]  46.99,78.87 270 top
U31  ATSHA204_SOIC8  [SOIC8]  60.96,87.38 180 top
U32  ATAES132  [SOIC8]  60.96,78.49 180 top
U33  33mhz  [CRYSTAL-OSC-SMD-5X3.2]  47.5,72.14 90 top
U34  ARDUINO_R3_SHIELD  [UNO_R3_SHIELD]  66.55,60.71 90 top
U35  ID-12/20SMD  [ID-12_SMD]  41.15,92.46 180 top
U36  74LVC1G04  [SOT353]  38.35,82.3 270 top
U37  ATECC108  [SOIC8]  121.16,96.27 180 top
U38  DS3231M  [SOIC8]  108.71,95.5 270 top
U39  AT97SC3204T  [TSSOP28]  107.19,78.87 270 top
U40  ATSHA204_SOIC8  [SOIC8]  121.16,87.38 180 top
U41  ATAES132  [SOIC8]  121.16,78.49 180 top
U42  33mhz  [CRYSTAL-OSC-SMD-5X3.2]  107.7,72.14 90 top
U43  ARDUINO_R3_SHIELD  [UNO_R3_SHIELD]  126.75,60.71 90 top
U44  ID-12/20SMD  [ID-12_SMD]  101.35,92.46 180 top
U45  74LVC1G04  [SOT353]  98.55,82.3 270 top
U46  ATECC108  [SOIC8]  181.36,96.27 180 top
U47  DS3231M  [SOIC8]  168.91,95.5 270 top
U48  AT97SC3204T  [TSSOP28]  167.39,78.87 270 top
U49  ATSHA204_SOIC8  [SOIC8]  181.36,87.38 180 top
U50  ATAES132  [SOIC8]  181.36,78.49 180 top
U51  33mhz  [CRYSTAL-OSC-SMD-5X3.2]  167.89,72.14 90 top
U52  ARDUINO_R3_SHIELD  [UNO_R3_SHIELD]  186.94,60.71 90 top
U53  ID-12/20SMD  [ID-12_SMD]  161.54,92.46 180 top
U54  74LVC1G04  [SOT353]  158.75,82.3 270 top
U55  ATECC108  [SOIC8]  60.96,150.11 180 top
U56  DS3231M  [SOIC8]  48.51,149.35 270 top
U57  AT97SC3204T  [TSSOP28]  46.99,132.72 270 top
U58  ATSHA204_SOIC8  [SOIC8]  60.96,141.22 180 top
U59  ATAES132  [SOIC8]  60.96,132.33 180 top
U60  33mhz  [CRYSTAL-OSC-SMD-5X3.2]  47.5,125.98 90 top
U61  ARDUINO_R3_SHIELD  [UNO_R3_SHIELD]  66.55,114.55 90 top
U62  ID-12/20SMD  [ID-12_SMD]  41.15,146.3 180 top
U63  74LVC1G04  [SOT353]  38.35,136.14 270 top
U64  ATECC108  [SOIC8]  121.16,150.11 180 top
U65  DS3231M  [SOIC8]  108.71,149.35 270 top
U66  AT97SC3204T  [TSSOP28]  107.19,132.72 270 top
U67  ATSHA204_SOIC8  [SOIC8]  121.16,141.22 180 top
U68  ATAES132  [SOIC8]  121.16,132.33 180 top
U69  33mhz  [CRYSTAL-OSC-SMD-5X3.2]  107.7,125.98 90 top
U70  ARDUINO_R3_SHIELD  [UNO_R3_SHIELD]  126.75,114.55 90 top
U71  ID-12/20SMD  [ID-12_SMD]  101.35,146.3 180 top
U72  74LVC1G04  [SOT353]  98.55,136.14 270 top
U73  ATECC108  [SOIC8]  181.36,150.11 180 top
U74  DS3231M  [SOIC8]  168.91,149.35 270 top
U75  AT97SC3204T  [TSSOP28]  167.39,132.72 270 top
U76  ATSHA204_SOIC8  [SOIC8]  181.36,141.22 180 top
U77  ATAES132  [SOIC8]  181.36,132.33 180 top
U78  33mhz  [CRYSTAL-OSC-SMD-5X3.2]  167.89,125.98 90 top
U79  ARDUINO_R3_SHIELD  [UNO_R3_SHIELD]  186.94,114.55 90 top
U80  ID-12/20SMD  [ID-12_SMD]  161.54,146.3 180 top
U81  74LVC1G04  [SOT353]  158.75,136.14 270 top
U$1  [OSHW-LOGO-S]  120.78,10.03 270 top
U$2  [SFE_LOGO_NAME_FLAME_.1]  74.93,28.19 270 bottom
U$3  [OSHW-LOGO-S]  60.58,10.03 270 top
U$4  [OSHW-LOGO-S]  180.97,10.03 270 top
U$5  [SFE_LOGO_NAME_FLAME_.1]  135.13,28.19 270 bottom
U$6  [OSHW-LOGO-S]  60.58,63.88 270 top
U$7  [SFE_LOGO_NAME_FLAME_.1]  14.73,82.04 270 bottom
U$8  [OSHW-LOGO-S]  120.78,63.88 270 top
U$9  [SFE_LOGO_NAME_FLAME_.1]  74.93,82.04 270 bottom
U$10  [OSHW-LOGO-S]  180.97,63.88 270 top
U$11  [SFE_LOGO_NAME_FLAME_.1]  135.13,82.04 270 bottom
U$12  [OSHW-LOGO-S]  60.58,117.73 270 top
U$13  [SFE_LOGO_NAME_FLAME_.1]  14.73,135.89 270 bottom
U$14  [OSHW-LOGO-S]  120.78,117.73 270 top
U$15  [SFE_LOGO_NAME_FLAME_.1]  74.93,135.89 270 bottom
U$16  [OSHW-LOGO-S]  180.97,117.73 270 top
U$17  [SFE_LOGO_NAME_FLAME_.1]  135.13,135.89 270 bottom
U$101  [SFE_LOGO_NAME_FLAME_.1]  14.73,28.19 270 bottom

## Library data of the parts
A1-A18 = SparkFun-Passives
BAT1-BAT9 = SparkFun-Electromechanical; PROD_ID: BATT-08044
C1-C4 C7 C10-C12 C14 C17 C20-C24 C26 C27 C30 C33-C37 C39 C40 C43 C46-C50 C52 C53 C56 C59-C63 C65 C66 C69 C72-C76 C78 C79 C82 C85-C89 C91 C92 C95 C98-C102 C104 C105 C108 C111-C115 C117 = SparkFun-Capacitors; PROD_ID: CAP-00810
C5 C6 C8 C9 C15 C16 C18 C19 C28 C29 C31 C32 C41 C42 C44 C45 C54 C55 C57 C58 C67 C68 C70 C71 C80 C81 C83 C84 C93 C94 C96 C97 C106 C107 C109 C110 = SparkFun-Capacitors; PROD_ID: CAP-07877
C13 C25 C38 C51 C64 C77 C90 C103 C116 = SparkFun-Capacitors; PROD_ID: CAP-09824
E$1 = SparkFun-Retired
E$6 E$8 FID1-FID18 LOGO1-LOGO18 U$1-U$17 U$101 = SparkFun-Aesthetics
J1-J9 JP1 JP2 JP4 JP6 JP7 JP9 JP10 JP12 JP13 JP15 JP16 JP18 JP19 JP21 JP22 JP24 JP25 JP27 = SparkFun-Connectors
JP3 JP5 JP8 JP11 JP14 JP17 JP20 JP23 JP26 = SparkFun-Connectors; PROD_ID: CONN-08437
Q1-Q27 = SparkFun-DiscreteSemi; PROD_ID: TRANS-00830
R1 R9 R16 R23 R30 R37 R44 R51 R58 = SparkFun-Resistors; PROD_ID: RES-07856
R2 R4-R7 R10-R14 R17-R21 R24-R28 R31-R35 R38-R42 R45-R49 R52-R56 R59-R63 = SparkFun-Resistors; PROD_ID: RES-00824
R3 R8 R15 R22 R29 R36 R43 R50 R57 = SparkFun-Resistors; PROD_ID: RES-07857
S1-S9 = SparkFun-Electromechanical; PROD_ID: SWCH-08247
STAT STAT1-STAT8 = SparkFun-LED; PROD_ID: DIO-00821
U1 U18 U27 U36 U45 U54 U63 U72 U81 = SparkFun-DigitalIC; PROD_ID: 10843
U2 U15 U24 U33 U42 U51 U60 U69 U78 = SparkFun-FreqCtrl; PROD_ID: XTAL-11986
U3 U17 U26 U35 U44 U53 U62 U71 U80 = SparkFun-RF
U4 U16 U25 U34 U43 U52 U61 U70 U79 = SparkFun-Boards
U5 U14 U23 U32 U41 U50 U59 U68 U77 = SparkFun-DigitalIC; PROD_ID: IC-11983
U6 U12 U21 U30 U39 U48 U57 U66 U75 = SparkFun-DigitalIC; PROD_ID: IC-11984
U7 U11 U20 U29 U38 U47 U56 U65 U74 = SparkFun-DigitalIC; PROD_ID: IC-11985
U8 U13 U22 U31 U40 U49 U58 U67 U76 = SparkFun-DigitalIC; PROD_ID: IC-11981
U9 U10 U19 U28 U37 U46 U55 U64 U73 = SparkFun-DigitalIC; PROD_ID: IC-11982

## Nets
3.3V: C1.1 C2.1 C3.1 C4.1 C5.1 C6.1 C7.1 C8.1 C9.1 C10.1 C11.1 JP3.5 Q2.1 Q3.1 R2.1 R3.2 R4.1 R5.1 U2.4 U4.3.3V U5.8 U6.5 U6.10 U6.19 U6.22 U6.24 U6.28 U7.2 U8.8 U9.8
3.3V1: C14.1 C15.1 C16.1 C17.1 C18.1 C19.1 C20.1 C21.1 C22.1 C23.1 C24.1 JP5.5 Q4.1 Q5.1 R8.2 R10.1 R12.1 R14.1 U10.8 U11.2 U12.5 U12.10 U12.19 U12.22 U12.24 U12.28 U13.8 U14.8 U15.4 U16.3.3V
3.3V2: C27.1 C28.1 C29.1 C30.1 C31.1 C32.1 C33.1 C34.1 C35.1 C36.1 C37.1 JP8.5 Q7.1 Q8.1 R15.2 R17.1 R19.1 R21.1 U19.8 U20.2 U21.5 U21.10 U21.19 U21.22 U21.24 U21.28 U22.8 U23.8 U24.4 U25.3.3V
3.3V3: C40.1 C41.1 C42.1 C43.1 C44.1 C45.1 C46.1 C47.1 C48.1 C49.1 C50.1 JP11.5 Q10.1 Q11.1 R22.2 R24.1 R26.1 R28.1 U28.8 U29.2 U30.5 U30.10 U30.19 U30.22 U30.24 U30.28 U31.8 U32.8 U33.4 U34.3.3V
3.3V4: C53.1 C54.1 C55.1 C56.1 C57.1 C58.1 C59.1 C60.1 C61.1 C62.1 C63.1 JP14.5 Q13.1 Q14.1 R29.2 R31.1 R33.1 R35.1 U37.8 U38.2 U39.5 U39.10 U39.19 U39.22 U39.24 U39.28 U40.8 U41.8 U42.4 U43.3.3V
3.3V5: C66.1 C67.1 C68.1 C69.1 C70.1 C71.1 C72.1 C73.1 C74.1 C75.1 C76.1 JP17.5 Q16.1 Q17.1 R36.2 R38.1 R40.1 R42.1 U46.8 U47.2 U48.5 U48.10 U48.19 U48.22 U48.24 U48.28 U49.8 U50.8 U51.4 U52.3.3V
3.3V6: C79.1 C80.1 C81.1 C82.1 C83.1 C84.1 C85.1 C86.1 C87.1 C88.1 C89.1 JP20.5 Q19.1 Q20.1 R43.2 R45.1 R47.1 R49.1 U55.8 U56.2 U57.5 U57.10 U57.19 U57.22 U57.24 U57.28 U58.8 U59.8 U60.4 U61.3.3V
3.3V7: C92.1 C93.1 C94.1 C95.1 C96.1 C97.1 C98.1 C99.1 C100.1 C101.1 C102.1 JP23.5 Q22.1 Q23.1 R50.2 R52.1 R54.1 R56.1 U64.8 U65.2 U66.5 U66.10 U66.19 U66.22 U66.24 U66.28 U67.8 U68.8 U69.4 U70.3.3V
3.3V8: C105.1 C106.1 C107.1 C108.1 C109.1 C110.1 C111.1 C112.1 C113.1 C114.1 C115.1 JP26.5 Q25.1 Q26.1 R57.2 R59.1 R61.1 R63.1 U73.8 U74.2 U75.5 U75.10 U75.19 U75.22 U75.24 U75.28 U76.8 U77.8 U78.4 U79.3.3V
32KHZ: JP2.1 U7.1
32KHZ1: JP6.1 U11.1
32KHZ2: JP9.1 U20.1
32KHZ3: JP12.1 U29.1
32KHZ4: JP15.1 U38.1
32KHZ5: JP18.1 U47.1
32KHZ6: JP21.1 U56.1
32KHZ7: JP24.1 U65.1
32KHZ8: JP27.1 U74.1
!RESET: U1.2 U4.RES
!RESET1: U16.RES U18.2
!RESET2: U25.RES U27.2
!RESET3: U34.RES U36.2
!RESET4: U43.RES U45.2
!RESET5: U52.RES U54.2
!RESET6: U61.RES U63.2
!RESET7: U70.RES U72.2
!RESET8: U79.RES U81.2
ANT1: JP3.2 U3.3
ANT2: JP3.1 U3.4
ANT3: JP5.2 U17.3
ANT4: JP5.1 U17.4
ANT5: JP8.2 U26.3
ANT6: JP8.1 U26.4
ANT7: JP11.2 U35.3
ANT8: JP11.1 U35.4
ANT9: JP14.2 U44.3
ANT10: JP14.1 U44.4
ANT11: JP17.2 U53.3
ANT12: JP17.1 U53.4
ANT13: JP20.2 U62.3
ANT14: JP20.1 U62.4
ANT15: JP23.2 U71.3
ANT16: JP23.1 U71.4
ANT17: JP26.2 U80.3
ANT18: JP26.1 U80.4
GND: BAT1.GND C1.2 C2.2 C3.2 C4.2 C5.2 C6.2 C7.2 C8.2 C9.2 C10.2 C11.2 C12.2 C13.2 JP3.6 Q1.2 S2.1 STAT.C U1.3 U2.2 U3.1 U3.7 U4.GND@0 U4.GND@1 U4.GND@2 U5.4 U6.3 U6.4 U6.8 U6.9 U6.11 U6.15 U6.17 U6.18 U6.20 U6.23 U6.25 U6.26 U7.5 U8.4 U9.4
GND1: BAT2.GND C14.2 C15.2 C16.2 C17.2 C18.2 C19.2 C20.2 C21.2 C22.2 C23.2 C24.2 C25.2 C26.2 JP5.6 Q6.2 S1.1 STAT1.C U10.4 U11.5 U12.3 U12.4 U12.8 U12.9 U12.11 U12.15 U12.17 U12.18 U12.20 U12.23 U12.25 U12.26 U13.4 U14.4 U15.2 U16.GND@0 U16.GND@1 U16.GND@2 U17.1 U17.7 U18.3
GND2: BAT3.GND C27.2 C28.2 C29.2 C30.2 C31.2 C32.2 C33.2 C34.2 C35.2 C36.2 C37.2 C38.2 C39.2 JP8.6 Q9.2 S3.1 STAT2.C U19.4 U20.5 U21.3 U21.4 U21.8 U21.9 U21.11 U21.15 U21.17 U21.18 U21.20 U21.23 U21.25 U21.26 U22.4 U23.4 U24.2 U25.GND@0 U25.GND@1 U25.GND@2 U26.1 U26.7 U27.3
GND3: BAT4.GND C40.2 C41.2 C42.2 C43.2 C44.2 C45.2 C46.2 C47.2 C48.2 C49.2 C50.2 C51.2 C52.2 JP11.6 Q12.2 S4.1 STAT3.C U28.4 U29.5 U30.3 U30.4 U30.8 U30.9 U30.11 U30.15 U30.17 U30.18 U30.20 U30.23 U30.25 U30.26 U31.4 U32.4 U33.2 U34.GND@0 U34.GND@1 U34.GND@2 U35.1 U35.7 U36.3
GND4: BAT5.GND C53.2 C54.2 C55.2 C56.2 C57.2 C58.2 C59.2 C60.2 C61.2 C62.2 C63.2 C64.2 C65.2 JP14.6 Q15.2 S5.1 STAT4.C U37.4 U38.5 U39.3 U39.4 U39.8 U39.9 U39.11 U39.15 U39.17 U39.18 U39.20 U39.23 U39.25 U39.26 U40.4 U41.4 U42.2 U43.GND@0 U43.GND@1 U43.GND@2 U44.1 U44.7 U45.3
GND5: BAT6.GND C66.2 C67.2 C68.2 C69.2 C70.2 C71.2 C72.2 C73.2 C74.2 C75.2 C76.2 C77.2 C78.2 JP17.6 Q18.2 S6.1 STAT5.C U46.4 U47.5 U48.3 U48.4 U48.8 U48.9 U48.11 U48.15 U48.17 U48.18 U48.20 U48.23 U48.25 U48.26 U49.4 U50.4 U51.2 U52.GND@0 U52.GND@1 U52.GND@2 U53.1 U53.7 U54.3
GND6: BAT7.GND C79.2 C80.2 C81.2 C82.2 C83.2 C84.2 C85.2 C86.2 C87.2 C88.2 C89.2 C90.2 C91.2 JP20.6 Q21.2 S7.1 STAT6.C U55.4 U56.5 U57.3 U57.4 U57.8 U57.9 U57.11 U57.15 U57.17 U57.18 U57.20 U57.23 U57.25 U57.26 U58.4 U59.4 U60.2 U61.GND@0 U61.GND@1 U61.GND@2 U62.1 U62.7 U63.3
GND7: BAT8.GND C92.2 C93.2 C94.2 C95.2 C96.2 C97.2 C98.2 C99.2 C100.2 C101.2 C102.2 C103.2 C104.2 JP23.6 Q24.2 S8.1 STAT7.C U64.4 U65.5 U66.3 U66.4 U66.8 U66.9 U66.11 U66.15 U66.17 U66.18 U66.20 U66.23 U66.25 U66.26 U67.4 U68.4 U69.2 U70.GND@0 U70.GND@1 U70.GND@2 U71.1 U71.7 U72.3
GND8: BAT9.GND C105.2 C106.2 C107.2 C108.2 C109.2 C110.2 C111.2 C112.2 C113.2 C114.2 C115.2 C116.2 C117.2 JP26.6 Q27.2 S9.1 STAT8.C U73.4 U74.5 U75.3 U75.4 U75.8 U75.9 U75.11 U75.15 U75.17 U75.18 U75.20 U75.23 U75.25 U75.26 U76.4 U77.4 U78.2 U79.GND@0 U79.GND@1 U79.GND@2 U80.1 U80.7 U81.3
N$1: R1.2 U3.10
N$4: A4.2 U4.A4
N$6: A5.2 U4.A5
N$12: R1.1 STAT.A
N$18: Q1.3 R2.2 U6.16
N$19: R3.1 U6.27
N$20: Q1.1 U1.4
N$21: R8.1 U12.27
N$22: R9.1 STAT1.A
N$23: R9.2 U17.10
N$123: A1.2 U16.A4
N$124: A2.2 U16.A5
N$125: Q6.3 R14.2 U12.16
N$126: Q6.1 U18.4
N$127: R15.1 U21.27
N$128: R16.1 STAT2.A
N$129: R16.2 U26.10
N$186: A3.2 U25.A4
N$187: A6.2 U25.A5
N$188: Q9.3 R21.2 U21.16
N$189: Q9.1 U27.4
N$190: R22.1 U30.27
N$191: R23.1 STAT3.A
N$192: R23.2 U35.10
N$238: A7.2 U34.A4
N$239: A8.2 U34.A5
N$240: Q12.3 R28.2 U30.16
N$241: Q12.1 U36.4
N$242: R29.1 U39.27
N$243: R30.1 STAT4.A
N$244: R30.2 U44.10
N$290: A9.2 U43.A4
N$291: A10.2 U43.A5
N$292: Q15.3 R35.2 U39.16
N$293: Q15.1 U45.4
N$294: R36.1 U48.27
N$295: R37.1 STAT5.A
N$296: R37.2 U53.10
N$342: A11.2 U52.A4
N$343: A12.2 U52.A5
N$344: Q18.3 R42.2 U48.16
N$345: Q18.1 U54.4
N$346: R43.1 U57.27
N$347: R44.1 STAT6.A
N$348: R44.2 U62.10
N$394: A13.2 U61.A4
N$395: A14.2 U61.A5
N$396: Q21.3 R49.2 U57.16
N$397: Q21.1 U63.4
N$398: R50.1 U66.27
N$399: R51.1 STAT7.A
N$400: R51.2 U71.10
N$446: A15.2 U70.A4
N$447: A16.2 U70.A5
N$448: Q24.3 R56.2 U66.16
N$449: Q24.1 U72.4
N$450: R57.1 U75.27
N$451: R58.1 STAT8.A
N$452: R58.2 U80.10
N$498: A17.2 U79.A4
N$499: A18.2 U79.A5
N$500: Q27.3 R63.2 U75.16
N$501: Q27.1 U81.4
PP: JP2.3 S2.3 U7.4
PP1: JP6.3 S1.3 U11.4
PP2: JP9.3 S3.3 U20.4
PP3: JP12.3 S4.3 U29.4
PP4: JP15.3 S5.3 U38.4
PP5: JP18.3 S6.3 U47.4
PP6: JP21.3 S7.3 U56.4
PP7: JP24.3 S8.3 U65.4
PP8: JP27.3 S9.3 U74.4
RX: U3.9 U4.RX
RX1: U16.RX U17.9
RX2: U25.RX U26.9
RX3: U34.RX U35.9
RX4: U43.RX U44.9
RX5: U52.RX U53.9
RX6: U61.RX U62.9
RX7: U70.RX U71.9
RX8: U79.RX U80.9
SCL: JP3.3 Q3.2 R5.2 U5.6 U6.2 U7.8 U8.6 U9.6
SCL1: JP5.3 Q5.2 R12.2 U10.6 U11.8 U12.2 U13.6 U14.6
SCL2: JP8.3 Q8.2 R19.2 U19.6 U20.8 U21.2 U22.6 U23.6
SCL3: JP11.3 Q11.2 R26.2 U28.6 U29.8 U30.2 U31.6 U32.6
SCL4: JP14.3 Q14.2 R33.2 U37.6 U38.8 U39.2 U40.6 U41.6
SCL5: JP17.3 Q17.2 R40.2 U46.6 U47.8 U48.2 U49.6 U50.6
SCL6: JP20.3 Q20.2 R47.2 U55.6 U56.8 U57.2 U58.6 U59.6
SCL7: JP23.3 Q23.2 R54.2 U64.6 U65.8 U66.2 U67.6 U68.6
SCL8: JP26.3 Q26.2 R61.2 U73.6 U74.8 U75.2 U76.6 U77.6
SCL_IN: A5.1 Q3.3 R7.2 U4.SCL
SCL_IN1: A2.1 Q5.3 R13.2 U16.SCL
SCL_IN2: A6.1 Q8.3 R20.2 U25.SCL
SCL_IN3: A8.1 Q11.3 R27.2 U34.SCL
SCL_IN4: A10.1 Q14.3 R34.2 U43.SCL
SCL_IN5: A12.1 Q17.3 R41.2 U52.SCL
SCL_IN6: A14.1 Q20.3 R48.2 U61.SCL
SCL_IN7: A16.1 Q23.3 R55.2 U70.SCL
SCL_IN8: A18.1 Q26.3 R62.2 U79.SCL
SDA: JP3.4 Q2.2 R4.2 U5.5 U6.1 U7.7 U8.5 U9.5
SDA1: JP5.4 Q4.2 R10.2 U10.5 U11.7 U12.1 U13.5 U14.5
SDA2: JP8.4 Q7.2 R17.2 U19.5 U20.7 U21.1 U22.5 U23.5
SDA3: JP11.4 Q10.2 R24.2 U28.5 U29.7 U30.1 U31.5 U32.5
SDA4: JP14.4 Q13.2 R31.2 U37.5 U38.7 U39.1 U40.5 U41.5
SDA5: JP17.4 Q16.2 R38.2 U46.5 U47.7 U48.1 U49.5 U50.5
SDA6: JP20.4 Q19.2 R45.2 U55.5 U56.7 U57.1 U58.5 U59.5
SDA7: JP23.4 Q22.2 R52.2 U64.5 U65.7 U66.1 U67.5 U68.5
SDA8: JP26.4 Q25.2 R59.2 U73.5 U74.7 U75.1 U76.5 U77.5
SDA_IN: A4.1 Q2.3 R6.2 U4.SDA
SDA_IN1: A1.1 Q4.3 R11.2 U16.SDA
SDA_IN2: A3.1 Q7.3 R18.2 U25.SDA
SDA_IN3: A7.1 Q10.3 R25.2 U34.SDA
SDA_IN4: A9.1 Q13.3 R32.2 U43.SDA
SDA_IN5: A11.1 Q16.3 R39.2 U52.SDA
SDA_IN6: A13.1 Q19.3 R46.2 U61.SDA
SDA_IN7: A15.1 Q22.3 R53.2 U70.SDA
SDA_IN8: A17.1 Q25.3 R60.2 U79.SDA
SQW: JP2.2 U7.3
SQW1: JP6.2 U11.3
SQW2: JP9.2 U20.3
SQW3: JP12.2 U29.3
SQW4: JP15.2 U38.3
SQW5: JP18.2 U47.3
SQW6: JP21.2 U56.3
SQW7: JP24.2 U65.3
SQW8: JP27.2 U74.3
TPM_CLK: U2.3 U6.21
TPM_CLK1: U12.21 U15.3
TPM_CLK2: U21.21 U24.3
TPM_CLK3: U30.21 U33.3
TPM_CLK4: U39.21 U42.3
TPM_CLK5: U48.21 U51.3
TPM_CLK6: U57.21 U60.3
TPM_CLK7: U66.21 U69.3
TPM_CLK8: U75.21 U78.3
VBAT: BAT1.PWR@1 JP1.1 U7.6
VBAT1: BAT2.PWR@1 JP4.1 U11.6
VBAT2: BAT3.PWR@1 JP7.1 U20.6
VBAT3: BAT4.PWR@1 JP10.1 U29.6
VBAT4: BAT5.PWR@1 JP13.1 U38.6
VBAT5: BAT6.PWR@1 JP16.1 U47.6
VBAT6: BAT7.PWR@1 JP19.1 U56.6
VBAT7: BAT8.PWR@1 JP22.1 U65.6
VBAT8: BAT9.PWR@1 JP25.1 U74.6
VCCIO: C12.1 C13.1 R6.1 R7.1 U1.5 U3.2 U3.11 U4.IOREF
VCCIO1: C25.1 C26.1 R11.1 R13.1 U16.IOREF U17.2 U17.11 U18.5
VCCIO2: C38.1 C39.1 R18.1 R20.1 U25.IOREF U26.2 U26.11 U27.5
VCCIO3: C51.1 C52.1 R25.1 R27.1 U34.IOREF U35.2 U35.11 U36.5
VCCIO4: C64.1 C65.1 R32.1 R34.1 U43.IOREF U44.2 U44.11 U45.5
VCCIO5: C77.1 C78.1 R39.1 R41.1 U52.IOREF U53.2 U53.11 U54.5
VCCIO6: C90.1 C91.1 R46.1 R48.1 U61.IOREF U62.2 U62.11 U63.5
VCCIO7: C103.1 C104.1 R53.1 R55.1 U70.IOREF U71.2 U71.11 U72.5
VCCIO8: C116.1 C117.1 R60.1 R62.1 U79.IOREF U80.2 U80.11 U81.5

## Tracks (layer width: path | path; a pad name or v marks a point on that pad's centre or on a via)
3.3V  (via drill 0.51)
  Top 0.203: R3.2 C8.1 52.41,21.3 U6.28 | C4.1 45.67,30.01 | 45.67,30.01 C5.1 | U6.5 48.97,29.68 | R2.1 41.31,26.16 45.72,26.16 | U6.10 45.67,30.01
  Top 0.254: Q3.1 61.15,16.92 R5.1 61.05,18.88 62.87,20.7 62.87,21.21 62.74,21.34 62.74,21.89 U5.8 v62.87,24 64.56,24 C7.1 | Q2.1 56.07,16.92 R4.1 55.97,18.38 v56.01,18.41 | C2.1 64.77,41.78 v62.87,41.78 U9.8 | C3.1 64.77,32.89 v62.87,32.89 U8.8 | U7.2 47.24,42.29 v48.01,43.05 48.01,44.96 47.75,45.21 C1.1 | C9.1 44.58,19.81 45.67,20.9 U6.19 | 48.97,29.68 48.9,29.76 C6.1
  Top 0.406: v24.64,53.09 17.78,53.09 13.97,49.28 13.97,40.39 14.99,39.37 16.51,39.37 JP3.5
  Bottom 0.254: v56.01,18.41 56.01,22.73
  Bottom 0.406: 40.01,53.09 41.91,53.09 48.01,46.99 v48.01,43.05 61.59,43.05 v62.87,41.78 v62.87,32.89 v62.87,24 61.59,22.73 56.01,22.73 54.1,22.73 51.44,25.4 v48.51,25.4 | U4.3.3V 39.88,53.21 40.01,53.09 | 40.01,53.09 v24.64,53.09
  pour Top (isolate 0.305): 49.15,28.45 48.9,28.45 48.9,27.18 45.72,27.18 45.72,28.45 45.59,28.45 45.59,21.21 44.83,20.45 43.94,20.45 43.94,17.27 45.72,15.49 45.72,13.84 45.97,13.59 47.37,13.59 47.37,18.03 45.72,18.03 45.72,24.26 45.97,24.51 47.5,24.51 47.75,24.26 47.75,22.99 47.62,22.86 47.62,21.59 47.75,21.59 47.75,22.86 48.9,22.86 48.9,21.59 49.15,21.59 49.15,22.73 49.4,22.99 51.18,22.99 51.44,22.73 51.44,21.59 51.82,21.59 51.82,24.51 49.15,27.18
3.3V1  (via drill 0.51)
  Top 0.203: R8.2 C18.1 112.61,21.3 U12.28 | C17.1 105.87,30.01 | 105.87,30.01 C16.1 | U12.5 109.17,29.68 | R14.1 101.51,26.16 105.92,26.16 | U12.10 105.87,30.01
  Top 0.254: Q5.1 121.35,16.92 R12.1 121.25,18.88 123.06,20.7 123.06,21.21 122.94,21.34 122.94,21.89 U14.8 v123.06,24 124.75,24 C23.1 | Q4.1 116.27,16.92 R10.1 116.17,18.38 v116.2,18.41 | C22.1 124.97,41.78 v123.06,41.78 U10.8 | C21.1 124.97,32.89 v123.06,32.89 U13.8 | U11.2 107.44,42.29 v108.2,43.05 108.2,44.96 107.95,45.21 C20.1 | C19.1 104.78,19.81 105.87,20.9 U12.19 | 109.17,29.68 109.09,29.76 C15.1
  Top 0.406: v84.84,53.09 77.98,53.09 74.17,49.28 74.17,40.39 75.18,39.37 76.71,39.37 JP5.5
  Bottom 0.254: v116.2,18.41 116.2,22.73
  Bottom 0.406: 100.2,53.09 102.11,53.09 108.2,46.99 v108.2,43.05 121.79,43.05 v123.06,41.78 v123.06,32.89 v123.06,24 121.79,22.73 116.2,22.73 114.3,22.73 111.63,25.4 v108.71,25.4 | U16.3.3V 100.08,53.21 100.2,53.09 | 100.2,53.09 v84.84,53.09
  pour Top (isolate 0.305): 109.35,28.45 109.09,28.45 109.09,27.18 105.92,27.18 105.92,28.45 105.79,28.45 105.79,21.21 105.03,20.45 104.14,20.45 104.14,17.27 105.92,15.49 105.92,13.84 106.17,13.59 107.57,13.59 107.57,18.03 105.92,18.03 105.92,24.26 106.17,24.51 107.7,24.51 107.95,24.26 107.95,22.99 107.82,22.86 107.82,21.59 107.95,21.59 107.95,22.86 109.09,22.86 109.09,21.59 109.35,21.59 109.35,22.73 109.6,22.99 111.38,22.99 111.63,22.73 111.63,21.59 112.01,21.59 112.01,24.51 109.35,27.18
3.3V2  (via drill 0.51)
  Top 0.203: R15.2 C31.1 172.81,21.3 U21.28 | C30.1 166.06,30.01 | 166.06,30.01 C29.1 | U21.5 169.37,29.68 | R21.1 161.71,26.16 166.12,26.16 | U21.10 166.06,30.01
  Top 0.254: Q8.1 181.54,16.92 R19.1 181.44,18.88 183.26,20.7 183.26,21.21 183.13,21.34 183.13,21.89 U23.8 v183.26,24 184.95,24 C36.1 | Q7.1 176.46,16.92 R17.1 176.36,18.38 v176.4,18.41 | C35.1 185.17,41.78 v183.26,41.78 U19.8 | C34.1 185.17,32.89 v183.26,32.89 U22.8 | U20.2 167.64,42.29 v168.4,43.05 168.4,44.96 168.15,45.21 C33.1 | C32.1 164.97,19.81 166.06,20.9 U21.19 | 169.37,29.68 169.29,29.76 C28.1
  Top 0.406: v145.03,53.09 138.18,53.09 134.37,49.28 134.37,40.39 135.38,39.37 136.91,39.37 JP8.5
  Bottom 0.254: v176.4,18.41 176.4,22.73
  Bottom 0.406: 160.4,53.09 162.31,53.09 168.4,46.99 v168.4,43.05 181.99,43.05 v183.26,41.78 v183.26,32.89 v183.26,24 181.99,22.73 176.4,22.73 174.5,22.73 171.83,25.4 v168.91,25.4 | U25.3.3V 160.27,53.21 160.4,53.09 | 160.4,53.09 v145.03,53.09
  pour Top (isolate 0.305): 169.54,28.45 169.29,28.45 169.29,27.18 166.12,27.18 166.12,28.45 165.99,28.45 165.99,21.21 165.23,20.45 164.34,20.45 164.34,17.27 166.12,15.49 166.12,13.84 166.37,13.59 167.77,13.59 167.77,18.03 166.12,18.03 166.12,24.26 166.37,24.51 167.89,24.51 168.15,24.26 168.15,22.99 168.02,22.86 168.02,21.59 168.15,21.59 168.15,22.86 169.29,22.86 169.29,21.59 169.54,21.59 169.54,22.73 169.8,22.99 171.58,22.99 171.83,22.73 171.83,21.59 172.21,21.59 172.21,24.51 169.54,27.18
3.3V3  (via drill 0.51)
  Top 0.203: R22.2 C44.1 52.41,75.15 U30.28 | C43.1 45.67,83.86 | 45.67,83.86 C42.1 | U30.5 48.97,83.53 | R28.1 41.31,80.01 45.72,80.01 | U30.10 45.67,83.86
  Top 0.254: Q11.1 61.15,70.77 R26.1 61.05,72.73 62.87,74.55 62.87,75.06 62.74,75.18 62.74,75.74 U32.8 v62.87,77.85 64.56,77.85 C49.1 | Q10.1 56.07,70.77 R24.1 55.97,72.22 v56.01,72.26 | C48.1 64.77,95.63 v62.87,95.63 U28.8 | C47.1 64.77,86.74 v62.87,86.74 U31.8 | U29.2 47.24,96.14 v48.01,96.9 48.01,98.81 47.75,99.06 C46.1 | C45.1 44.58,73.66 45.67,74.75 U30.19 | 48.97,83.53 48.9,83.61 C41.1
  Top 0.406: v24.64,106.93 17.78,106.93 13.97,103.12 13.97,94.23 14.99,93.22 16.51,93.22 JP11.5
  Bottom 0.254: v56.01,72.26 56.01,76.58
  Bottom 0.406: 40.01,106.93 41.91,106.93 48.01,100.84 v48.01,96.9 61.59,96.9 v62.87,95.63 v62.87,86.74 v62.87,77.85 61.59,76.58 56.01,76.58 54.1,76.58 51.44,79.25 v48.51,79.25 | U34.3.3V 39.88,107.06 40.01,106.93 | 40.01,106.93 v24.64,106.93
  pour Top (isolate 0.305): 49.15,82.3 48.9,82.3 48.9,81.03 45.72,81.03 45.72,82.3 45.59,82.3 45.59,75.06 44.83,74.3 43.94,74.3 43.94,71.12 45.72,69.34 45.72,67.69 45.97,67.44 47.37,67.44 47.37,71.88 45.72,71.88 45.72,78.11 45.97,78.36 47.5,78.36 47.75,78.11 47.75,76.83 47.62,76.71 47.62,75.44 47.75,75.44 47.75,76.71 48.9,76.71 48.9,75.44 49.15,75.44 49.15,76.58 49.4,76.83 51.18,76.83 51.44,76.58 51.44,75.44 51.82,75.44 51.82,78.36 49.15,81.03
3.3V4  (via drill 0.51)
  Top 0.203: R29.2 C57.1 112.61,75.15 U39.28 | C56.1 105.87,83.86 | 105.87,83.86 C55.1 | U39.5 109.17,83.53 | R35.1 101.51,80.01 105.92,80.01 | U39.10 105.87,83.86
  Top 0.254: Q14.1 121.35,70.77 R33.1 121.25,72.73 123.06,74.55 123.06,75.06 122.94,75.18 122.94,75.74 U41.8 v123.06,77.85 124.75,77.85 C62.1 | Q13.1 116.27,70.77 R31.1 116.17,72.22 v116.2,72.26 | C61.1 124.97,95.63 v123.06,95.63 U37.8 | C60.1 124.97,86.74 v123.06,86.74 U40.8 | U38.2 107.44,96.14 v108.2,96.9 108.2,98.81 107.95,99.06 C59.1 | C58.1 104.78,73.66 105.87,74.75 U39.19 | 109.17,83.53 109.09,83.61 C54.1
  Top 0.406: v84.84,106.93 77.98,106.93 74.17,103.12 74.17,94.23 75.18,93.22 76.71,93.22 JP14.5
  Bottom 0.254: v116.2,72.26 116.2,76.58
  Bottom 0.406: 100.2,106.93 102.11,106.93 108.2,100.84 v108.2,96.9 121.79,96.9 v123.06,95.63 v123.06,86.74 v123.06,77.85 121.79,76.58 116.2,76.58 114.3,76.58 111.63,79.25 v108.71,79.25 | U43.3.3V 100.08,107.06 100.2,106.93 | 100.2,106.93 v84.84,106.93
  pour Top (isolate 0.305): 109.35,82.3 109.09,82.3 109.09,81.03 105.92,81.03 105.92,82.3 105.79,82.3 105.79,75.06 105.03,74.3 104.14,74.3 104.14,71.12 105.92,69.34 105.92,67.69 106.17,67.44 107.57,67.44 107.57,71.88 105.92,71.88 105.92,78.11 106.17,78.36 107.7,78.36 107.95,78.11 107.95,76.83 107.82,76.71 107.82,75.44 107.95,75.44 107.95,76.71 109.09,76.71 109.09,75.44 109.35,75.44 109.35,76.58 109.6,76.83 111.38,76.83 111.63,76.58 111.63,75.44 112.01,75.44 112.01,78.36 109.35,81.03
3.3V5  (via drill 0.51)
  Top 0.203: R36.2 C70.1 172.81,75.15 U48.28 | C69.1 166.06,83.86 | 166.06,83.86 C68.1 | U48.5 169.37,83.53 | R42.1 161.71,80.01 166.12,80.01 | U48.10 166.06,83.86
  Top 0.254: Q17.1 181.54,70.77 R40.1 181.44,72.73 183.26,74.55 183.26,75.06 183.13,75.18 183.13,75.74 U50.8 v183.26,77.85 184.95,77.85 C75.1 | Q16.1 176.46,70.77 R38.1 176.36,72.22 v176.4,72.26 | C74.1 185.17,95.63 v183.26,95.63 U46.8 | C73.1 185.17,86.74 v183.26,86.74 U49.8 | U47.2 167.64,96.14 v168.4,96.9 168.4,98.81 168.15,99.06 C72.1 | C71.1 164.97,73.66 166.06,74.75 U48.19 | 169.37,83.53 169.29,83.61 C67.1
  Top 0.406: v145.03,106.93 138.18,106.93 134.37,103.12 134.37,94.23 135.38,93.22 136.91,93.22 JP17.5
  Bottom 0.254: v176.4,72.26 176.4,76.58
  Bottom 0.406: 160.4,106.93 162.31,106.93 168.4,100.84 v168.4,96.9 181.99,96.9 v183.26,95.63 v183.26,86.74 v183.26,77.85 181.99,76.58 176.4,76.58 174.5,76.58 171.83,79.25 v168.91,79.25 | U52.3.3V 160.27,107.06 160.4,106.93 | 160.4,106.93 v145.03,106.93
  pour Top (isolate 0.305): 169.54,82.3 169.29,82.3 169.29,81.03 166.12,81.03 166.12,82.3 165.99,82.3 165.99,75.06 165.23,74.3 164.34,74.3 164.34,71.12 166.12,69.34 166.12,67.69 166.37,67.44 167.77,67.44 167.77,71.88 166.12,71.88 166.12,78.11 166.37,78.36 167.89,78.36 168.15,78.11 168.15,76.83 168.02,76.71 168.02,75.44 168.15,75.44 168.15,76.71 169.29,76.71 169.29,75.44 169.54,75.44 169.54,76.58 169.8,76.83 171.58,76.83 171.83,76.58 171.83,75.44 172.21,75.44 172.21,78.36 169.54,81.03
3.3V6  (via drill 0.51)
  Top 0.203: R43.2 C83.1 52.41,129 U57.28 | C82.1 45.67,137.71 | 45.67,137.71 C81.1 | U57.5 48.97,137.38 | R49.1 41.31,133.86 45.72,133.86 | U57.10 45.67,137.71
  Top 0.254: Q20.1 61.15,124.61 R47.1 61.05,126.58 62.87,128.4 62.87,128.91 62.74,129.03 62.74,129.59 U59.8 v62.87,131.7 64.56,131.7 C88.1 | Q19.1 56.07,124.61 R45.1 55.97,126.07 v56.01,126.11 | C87.1 64.77,149.48 v62.87,149.48 U55.8 | C86.1 64.77,140.59 v62.87,140.59 U58.8 | U56.2 47.24,149.99 v48.01,150.75 48.01,152.65 47.75,152.91 C85.1 | C84.1 44.58,127.51 45.67,128.6 U57.19 | 48.97,137.38 48.9,137.45 C80.1
  Top 0.406: v24.64,160.78 17.78,160.78 13.97,156.97 13.97,148.08 14.99,147.07 16.51,147.07 JP20.5
  Bottom 0.254: v56.01,126.11 56.01,130.43
  Bottom 0.406: 40.01,160.78 41.91,160.78 48.01,154.69 v48.01,150.75 61.59,150.75 v62.87,149.48 v62.87,140.59 v62.87,131.7 61.59,130.43 56.01,130.43 54.1,130.43 51.44,133.1 v48.51,133.1 | U61.3.3V 39.88,160.91 40.01,160.78 | 40.01,160.78 v24.64,160.78
  pour Top (isolate 0.305): 49.15,136.14 48.9,136.14 48.9,134.87 45.72,134.87 45.72,136.14 45.59,136.14 45.59,128.91 44.83,128.14 43.94,128.14 43.94,124.97 45.72,123.19 45.72,121.54 45.97,121.28 47.37,121.28 47.37,125.73 45.72,125.73 45.72,131.95 45.97,132.21 47.5,132.21 47.75,131.95 47.75,130.68 47.62,130.56 47.62,129.29 47.75,129.29 47.75,130.56 48.9,130.56 48.9,129.29 49.15,129.29 49.15,130.43 49.4,130.68 51.18,130.68 51.44,130.43 51.44,129.29 51.82,129.29 51.82,132.21 49.15,134.87
3.3V7  (via drill 0.51)
  Top 0.203: R50.2 C96.1 112.61,129 U66.28 | C95.1 105.87,137.71 | 105.87,137.71 C94.1 | U66.5 109.17,137.38 | R56.1 101.51,133.86 105.92,133.86 | U66.10 105.87,137.71
  Top 0.254: Q23.1 121.35,124.61 R54.1 121.25,126.58 123.06,128.4 123.06,128.91 122.94,129.03 122.94,129.59 U68.8 v123.06,131.7 124.75,131.7 C101.1 | Q22.1 116.27,124.61 R52.1 116.17,126.07 v116.2,126.11 | C100.1 124.97,149.48 v123.06,149.48 U64.8 | C99.1 124.97,140.59 v123.06,140.59 U67.8 | U65.2 107.44,149.99 v108.2,150.75 108.2,152.65 107.95,152.91 C98.1 | C97.1 104.78,127.51 105.87,128.6 U66.19 | 109.17,137.38 109.09,137.45 C93.1
  Top 0.406: v84.84,160.78 77.98,160.78 74.17,156.97 74.17,148.08 75.18,147.07 76.71,147.07 JP23.5
  Bottom 0.254: v116.2,126.11 116.2,130.43
  Bottom 0.406: 100.2,160.78 102.11,160.78 108.2,154.69 v108.2,150.75 121.79,150.75 v123.06,149.48 v123.06,140.59 v123.06,131.7 121.79,130.43 116.2,130.43 114.3,130.43 111.63,133.1 v108.71,133.1 | U70.3.3V 100.08,160.91 100.2,160.78 | 100.2,160.78 v84.84,160.78
  pour Top (isolate 0.305): 109.35,136.14 109.09,136.14 109.09,134.87 105.92,134.87 105.92,136.14 105.79,136.14 105.79,128.91 105.03,128.14 104.14,128.14 104.14,124.97 105.92,123.19 105.92,121.54 106.17,121.28 107.57,121.28 107.57,125.73 105.92,125.73 105.92,131.95 106.17,132.21 107.7,132.21 107.95,131.95 107.95,130.68 107.82,130.56 107.82,129.29 107.95,129.29 107.95,130.56 109.09,130.56 109.09,129.29 109.35,129.29 109.35,130.43 109.6,130.68 111.38,130.68 111.63,130.43 111.63,129.29 112.01,129.29 112.01,132.21 109.35,134.87
3.3V8  (via drill 0.51)
  Top 0.203: R57.2 C109.1 172.81,129 U75.28 | C108.1 166.06,137.71 | 166.06,137.71 C107.1 | U75.5 169.37,137.38 | R63.1 161.71,133.86 166.12,133.86 | U75.10 166.06,137.71
  Top 0.254: Q26.1 181.54,124.61 R61.1 181.44,126.58 183.26,128.4 183.26,128.91 183.13,129.03 183.13,129.59 U77.8 v183.26,131.7 184.95,131.7 C114.1 | Q25.1 176.46,124.61 R59.1 176.36,126.07 v176.4,126.11 | C113.1 185.17,149.48 v183.26,149.48 U73.8 | C112.1 185.17,140.59 v183.26,140.59 U76.8 | U74.2 167.64,149.99 v168.4,150.75 168.4,152.65 168.15,152.91 C111.1 | C110.1 164.97,127.51 166.06,128.6 U75.19 | 169.37,137.38 169.29,137.45 C106.1
  Top 0.406: v145.03,160.78 138.18,160.78 134.37,156.97 134.37,148.08 135.38,147.07 136.91,147.07 JP26.5
  Bottom 0.254: v176.4,126.11 176.4,130.43
  Bottom 0.406: 160.4,160.78 162.31,160.78 168.4,154.69 v168.4,150.75 181.99,150.75 v183.26,149.48 v183.26,140.59 v183.26,131.7 181.99,130.43 176.4,130.43 174.5,130.43 171.83,133.1 v168.91,133.1 | U79.3.3V 160.27,160.91 160.4,160.78 | 160.4,160.78 v145.03,160.78
  pour Top (isolate 0.305): 169.54,136.14 169.29,136.14 169.29,134.87 166.12,134.87 166.12,136.14 165.99,136.14 165.99,128.91 165.23,128.14 164.34,128.14 164.34,124.97 166.12,123.19 166.12,121.54 166.37,121.28 167.77,121.28 167.77,125.73 166.12,125.73 166.12,131.95 166.37,132.21 167.89,132.21 168.15,131.95 168.15,130.68 168.02,130.56 168.02,129.29 168.15,129.29 168.15,130.56 169.29,130.56 169.29,129.29 169.54,129.29 169.54,130.43 169.8,130.68 171.58,130.68 171.83,130.43 171.83,129.29 172.21,129.29 172.21,132.21 169.54,134.87
32KHZ
  Top 0.254: JP2.1 43.81,43.56 U7.1
32KHZ1
  Top 0.254: JP6.1 104.01,43.56 U11.1
32KHZ2
  Top 0.254: JP9.1 164.21,43.56 U20.1
32KHZ3
  Top 0.254: JP12.1 43.81,97.41 U29.1
32KHZ4
  Top 0.254: JP15.1 104.01,97.41 U38.1
32KHZ5
  Top 0.254: JP18.1 164.21,97.41 U47.1
32KHZ6
  Top 0.254: JP21.1 43.81,151.26 U56.1
32KHZ7
  Top 0.254: JP24.1 104.01,151.26 U65.1
32KHZ8
  Top 0.254: JP27.1 164.21,151.26 U74.1
!RESET  (via drill 0.51)
  Top 0.254: U4.RES 43.69,56.39 v43.69,48.51 | v41.15,34.29 41.15,29.21 40.39,28.45 U1.2
  Bottom 0.254: v43.69,48.51 45.21,48.51 46.23,47.5 46.23,41.66 41.15,36.58 v41.15,34.29
!RESET1  (via drill 0.51)
  Top 0.254: U16.RES 103.89,56.39 v103.89,48.51 | v101.35,34.29 101.35,29.21 100.58,28.45 U18.2
  Bottom 0.254: v103.89,48.51 105.41,48.51 106.43,47.5 106.43,41.66 101.35,36.58 v101.35,34.29
!RESET2  (via drill 0.51)
  Top 0.254: U25.RES 164.08,56.39 v164.08,48.51 | v161.54,34.29 161.54,29.21 160.78,28.45 U27.2
  Bottom 0.254: v164.08,48.51 165.61,48.51 166.62,47.5 166.62,41.66 161.54,36.58 v161.54,34.29
!RESET3  (via drill 0.51)
  Top 0.254: U34.RES 43.69,110.24 v43.69,102.36 | v41.15,88.14 41.15,83.06 40.39,82.3 U36.2
  Bottom 0.254: v43.69,102.36 45.21,102.36 46.23,101.35 46.23,95.5 41.15,90.42 v41.15,88.14
!RESET4  (via drill 0.51)
  Top 0.254: U43.RES 103.89,110.24 v103.89,102.36 | v101.35,88.14 101.35,83.06 100.58,82.3 U45.2
  Bottom 0.254: v103.89,102.36 105.41,102.36 106.43,101.35 106.43,95.5 101.35,90.42 v101.35,88.14
!RESET5  (via drill 0.51)
  Top 0.254: U52.RES 164.08,110.24 v164.08,102.36 | v161.54,88.14 161.54,83.06 160.78,82.3 U54.2
  Bottom 0.254: v164.08,102.36 165.61,102.36 166.62,101.35 166.62,95.5 161.54,90.42 v161.54,88.14
!RESET6  (via drill 0.51)
  Top 0.254: U61.RES 43.69,164.08 v43.69,156.21 | v41.15,141.99 41.15,136.91 40.39,136.14 U63.2